# Altium PCB LC4_REV3.PcbDoc (part 1 of 2)
Units mm, origin at the board's own origin, x right, y up, seen from the top; angles counter-clockwise.
Board outline 41.25 x 70 mm, 4 copper layers (Layer 1, Layer 2, Layer 3, Layer 4), stack 1.942 mm thick; 162 components, 362 nets, 610 pads, 239 vias.
Unrouted connection lines stored in the file: 28.
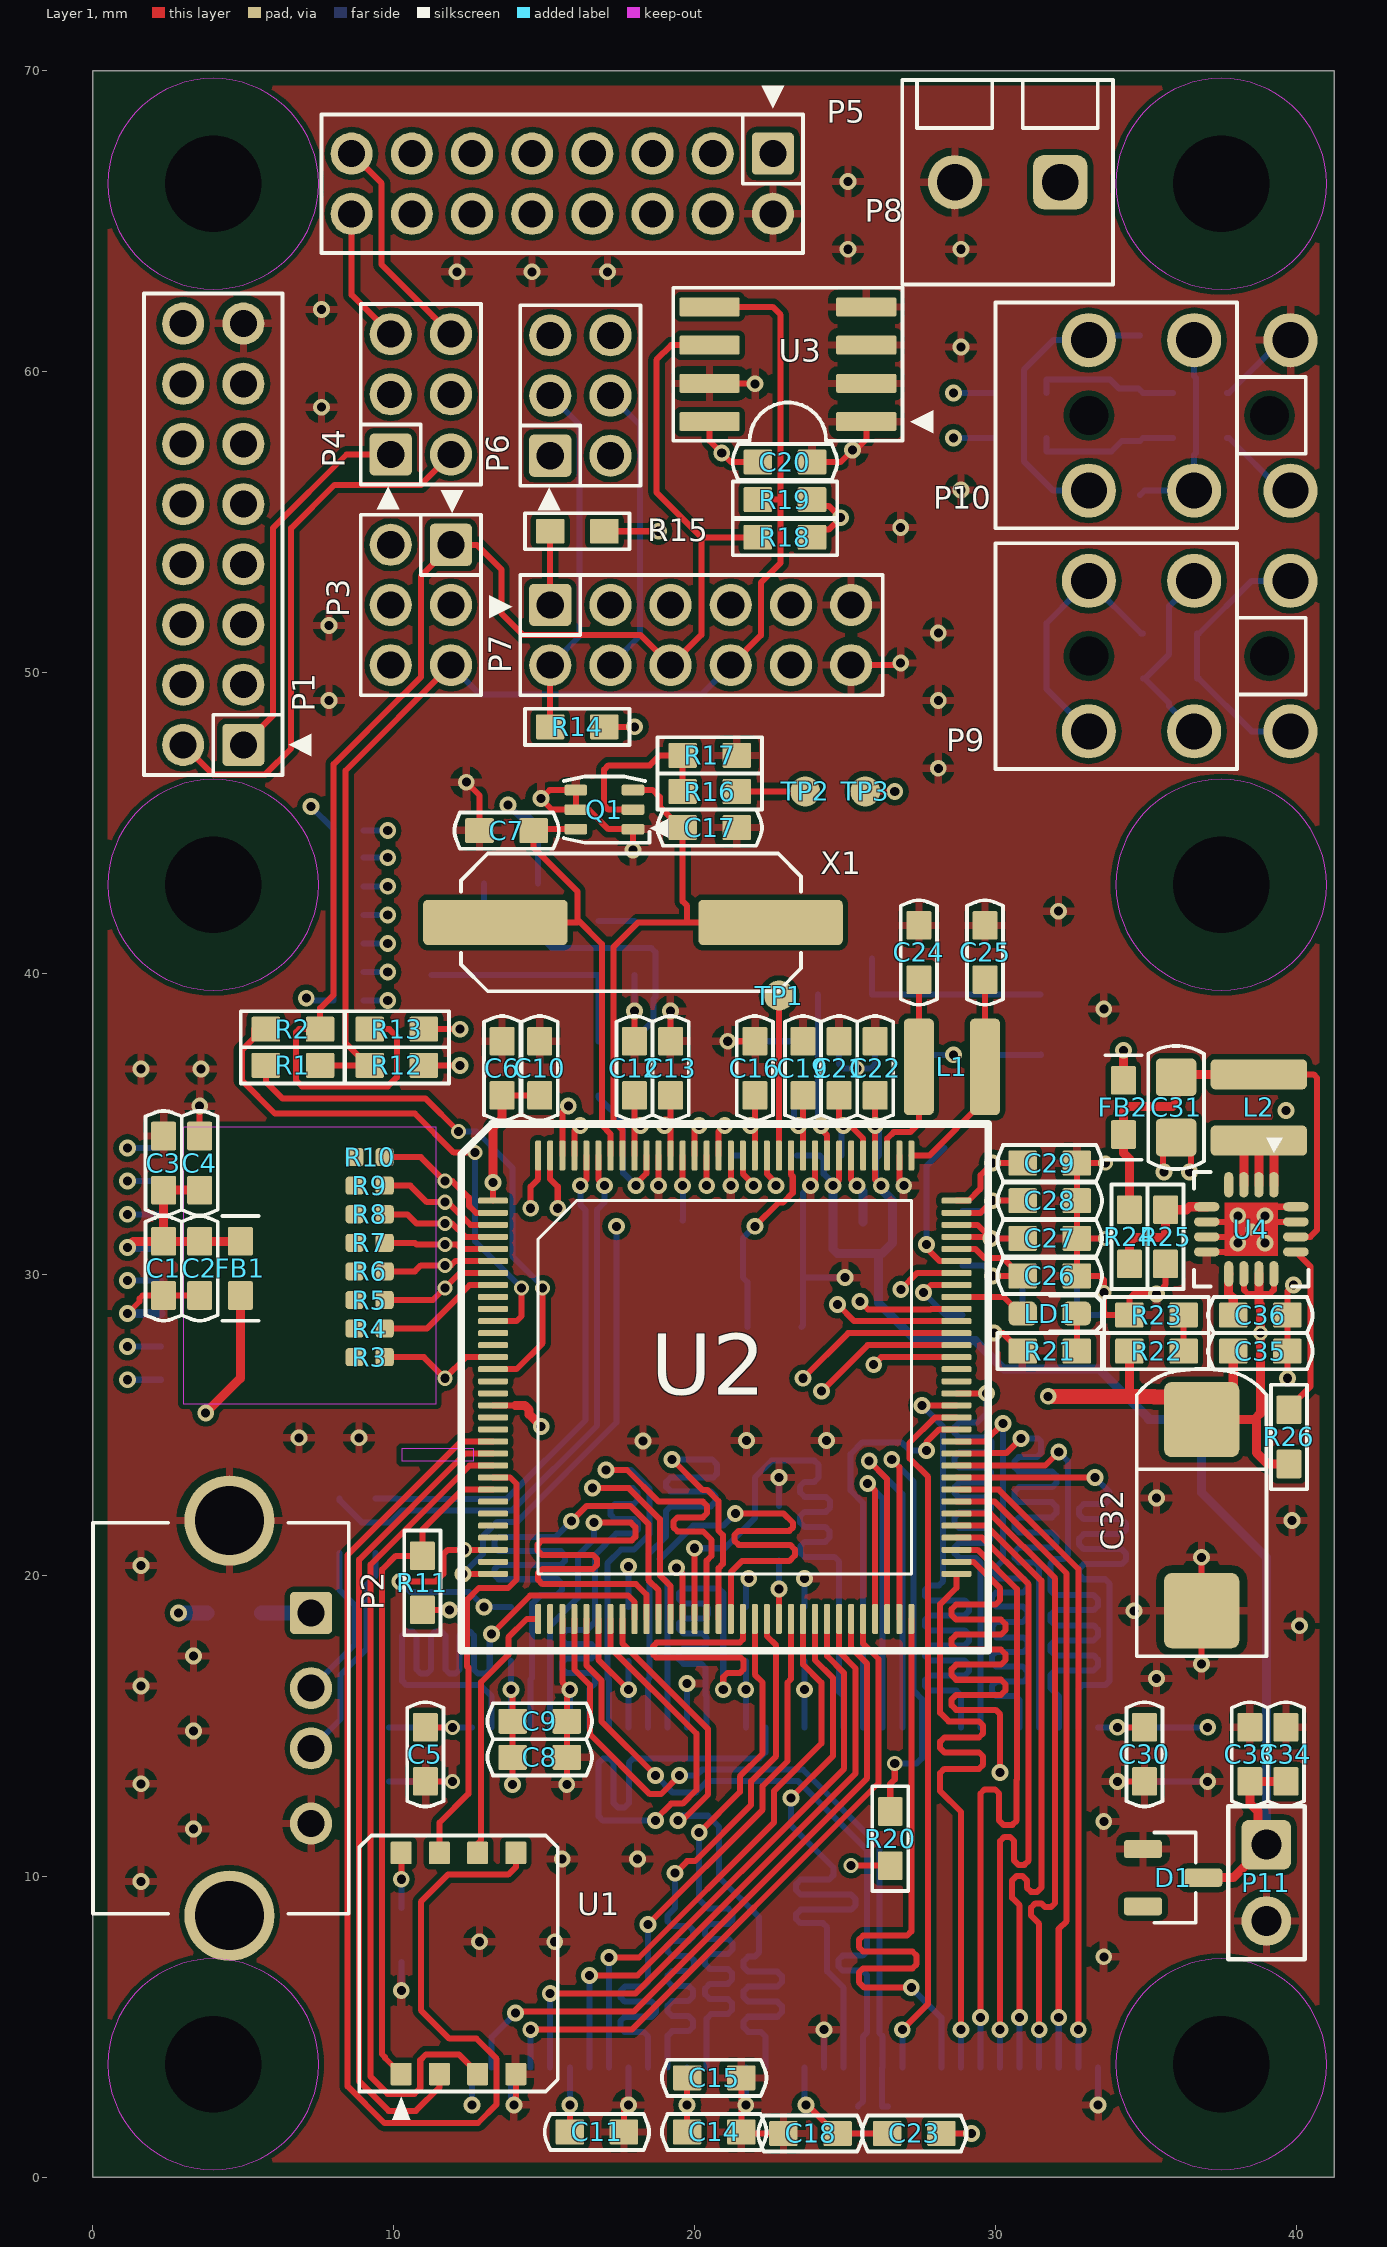
[diagram p0: Layer 1 view]
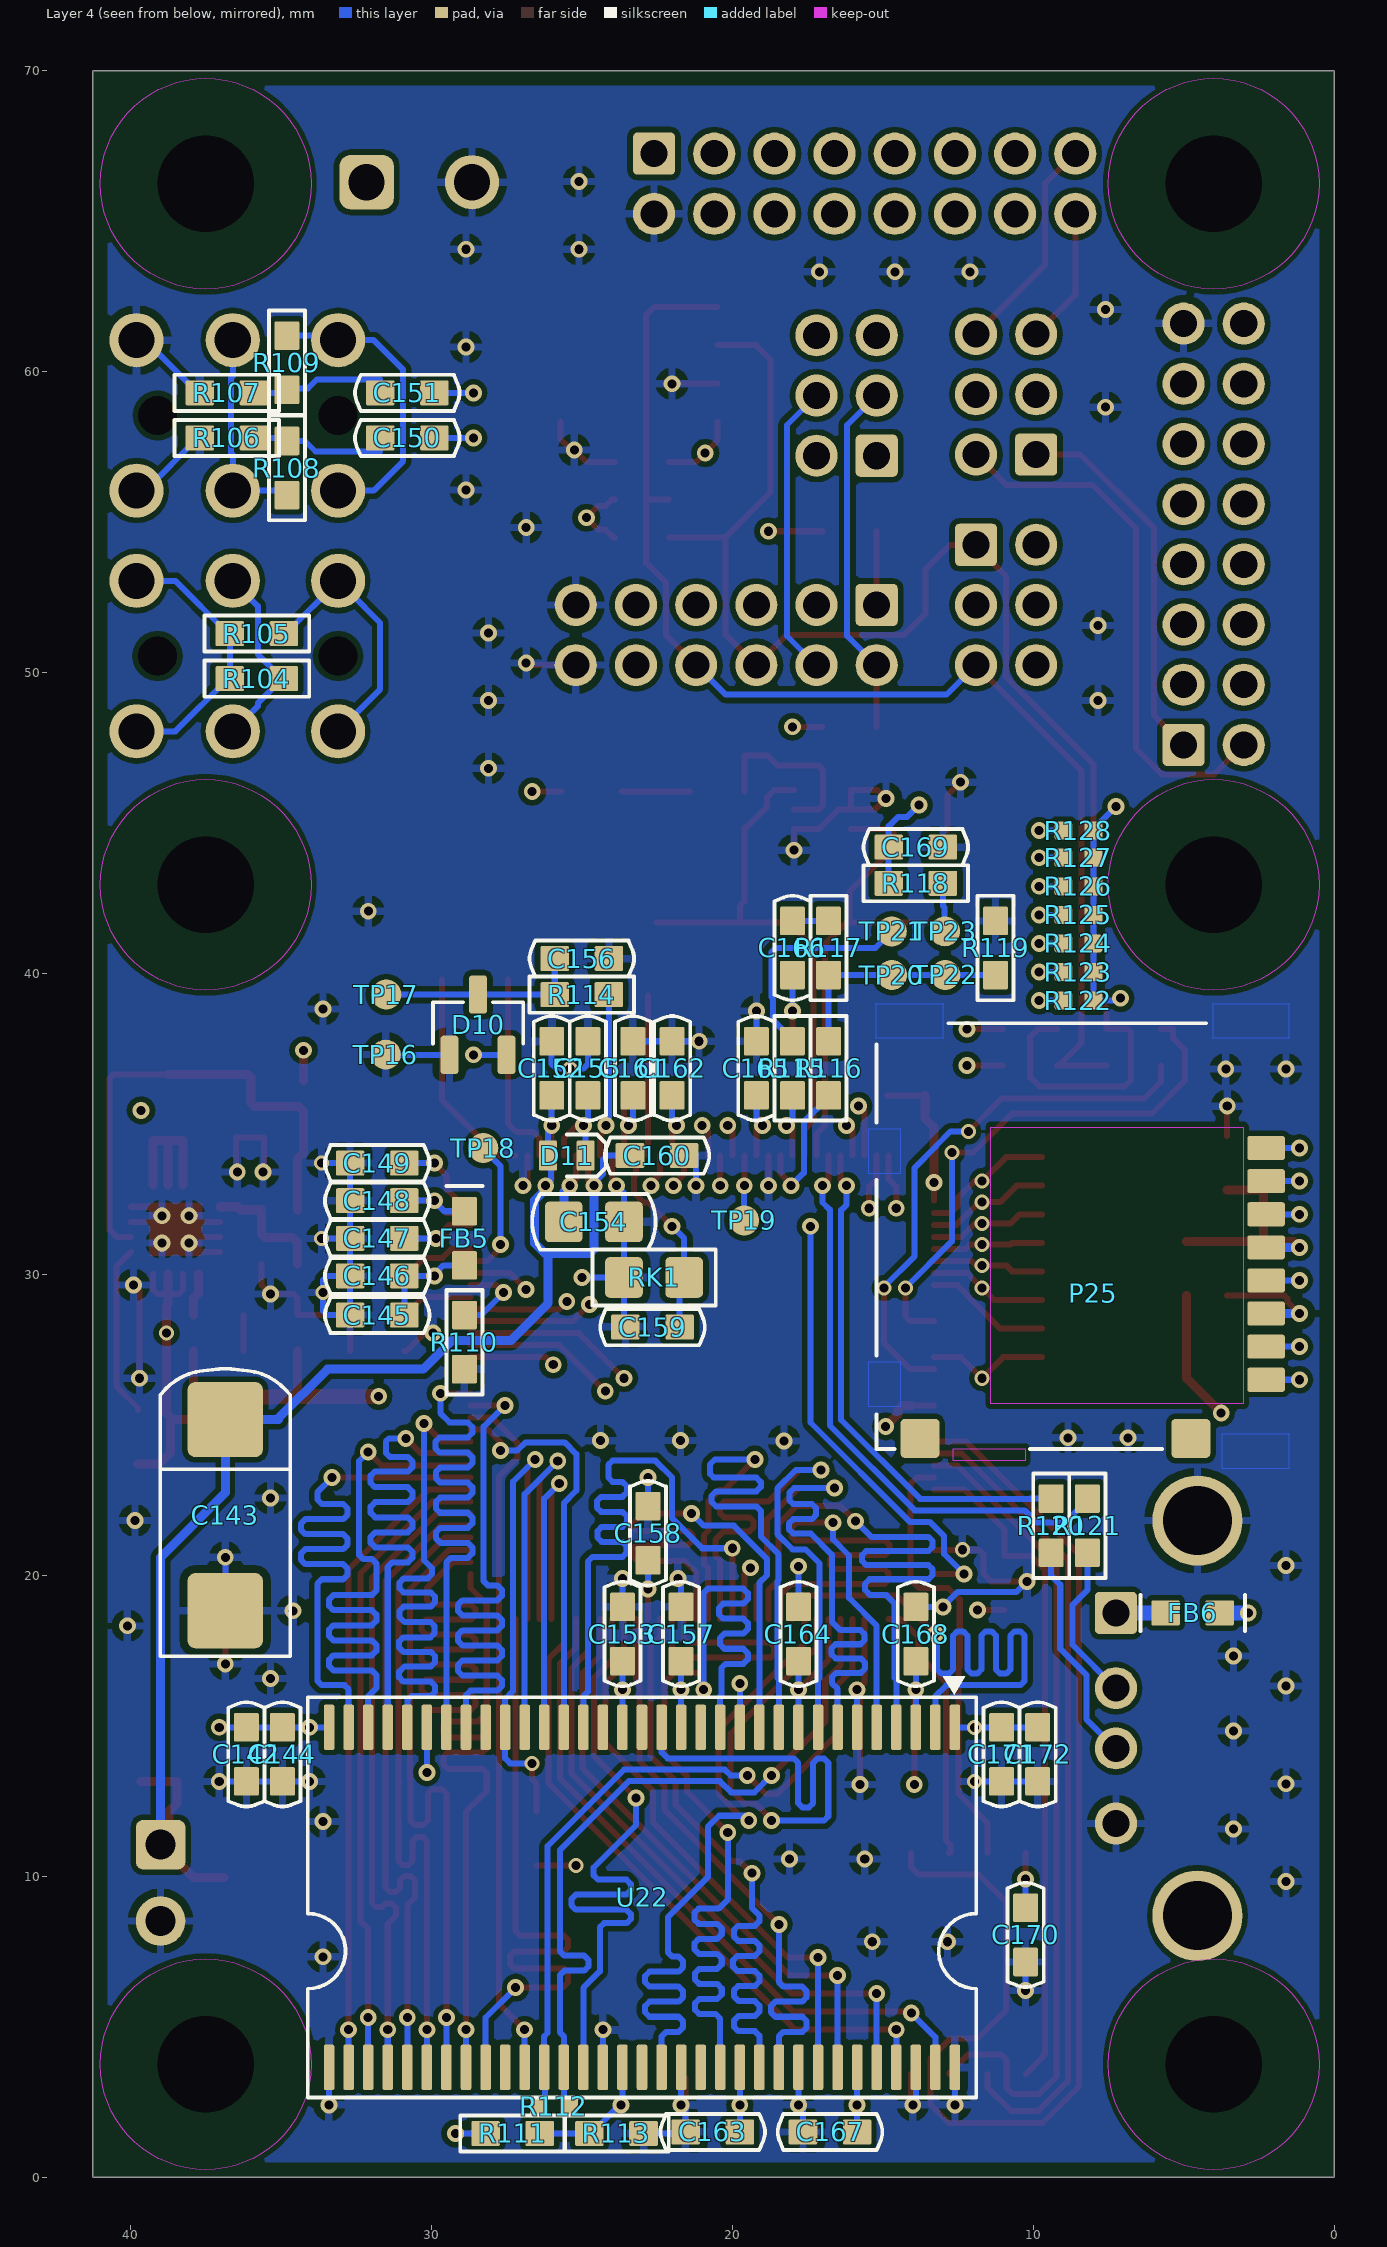
[diagram p1: Layer 4 view, seen from below]
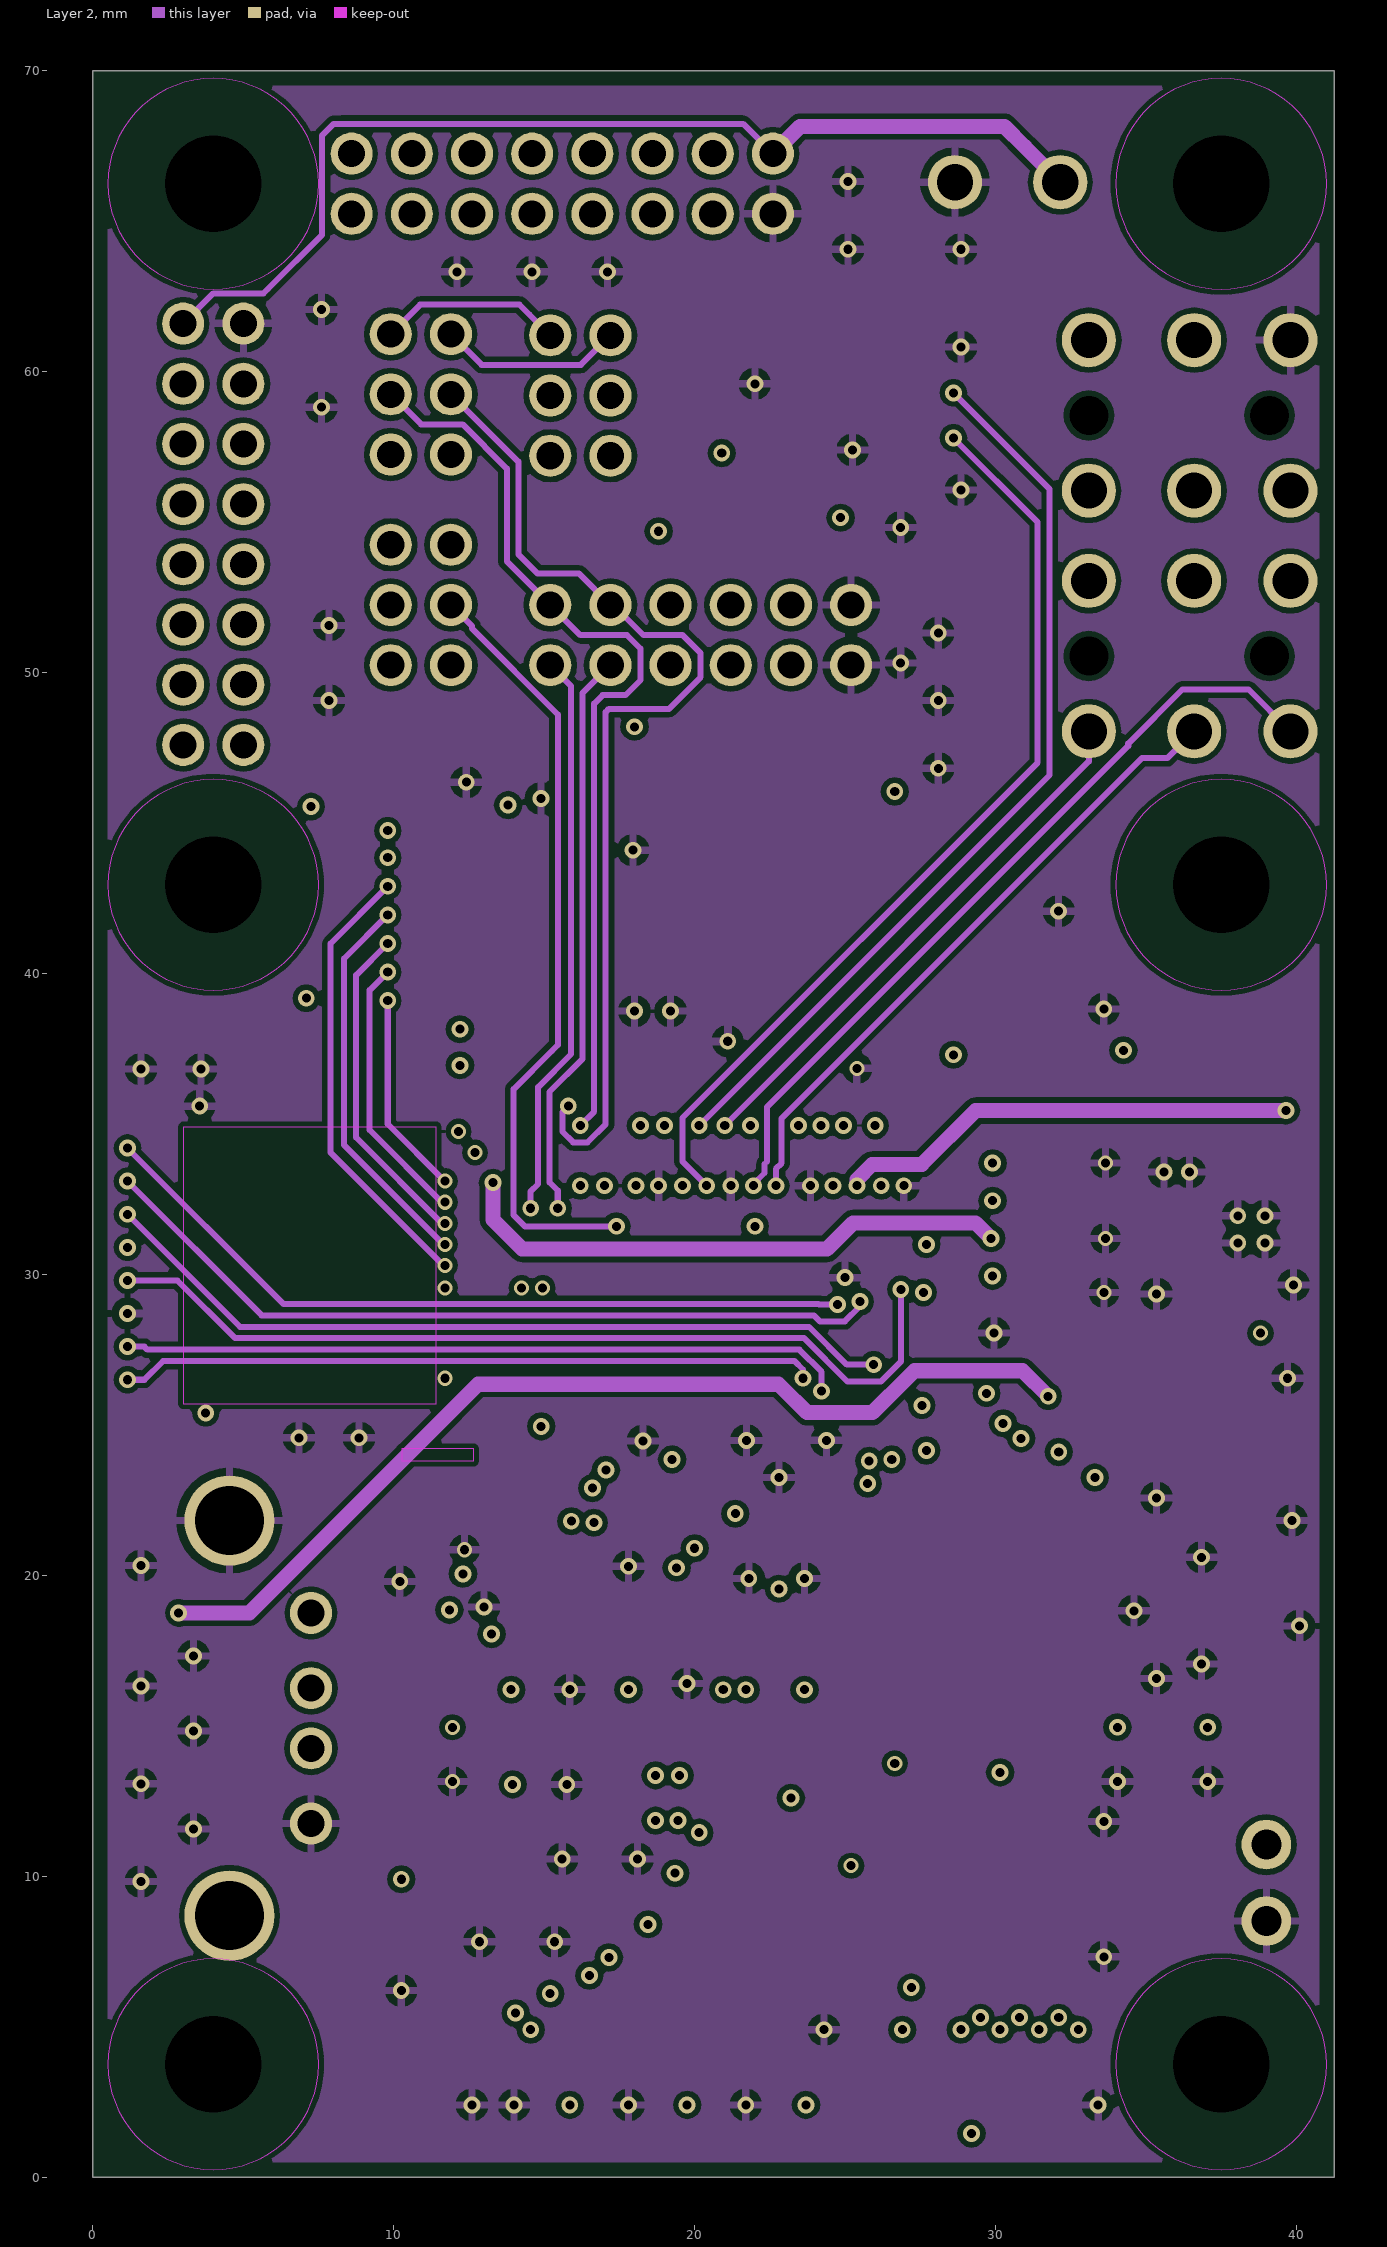
[diagram p2: Layer 2]
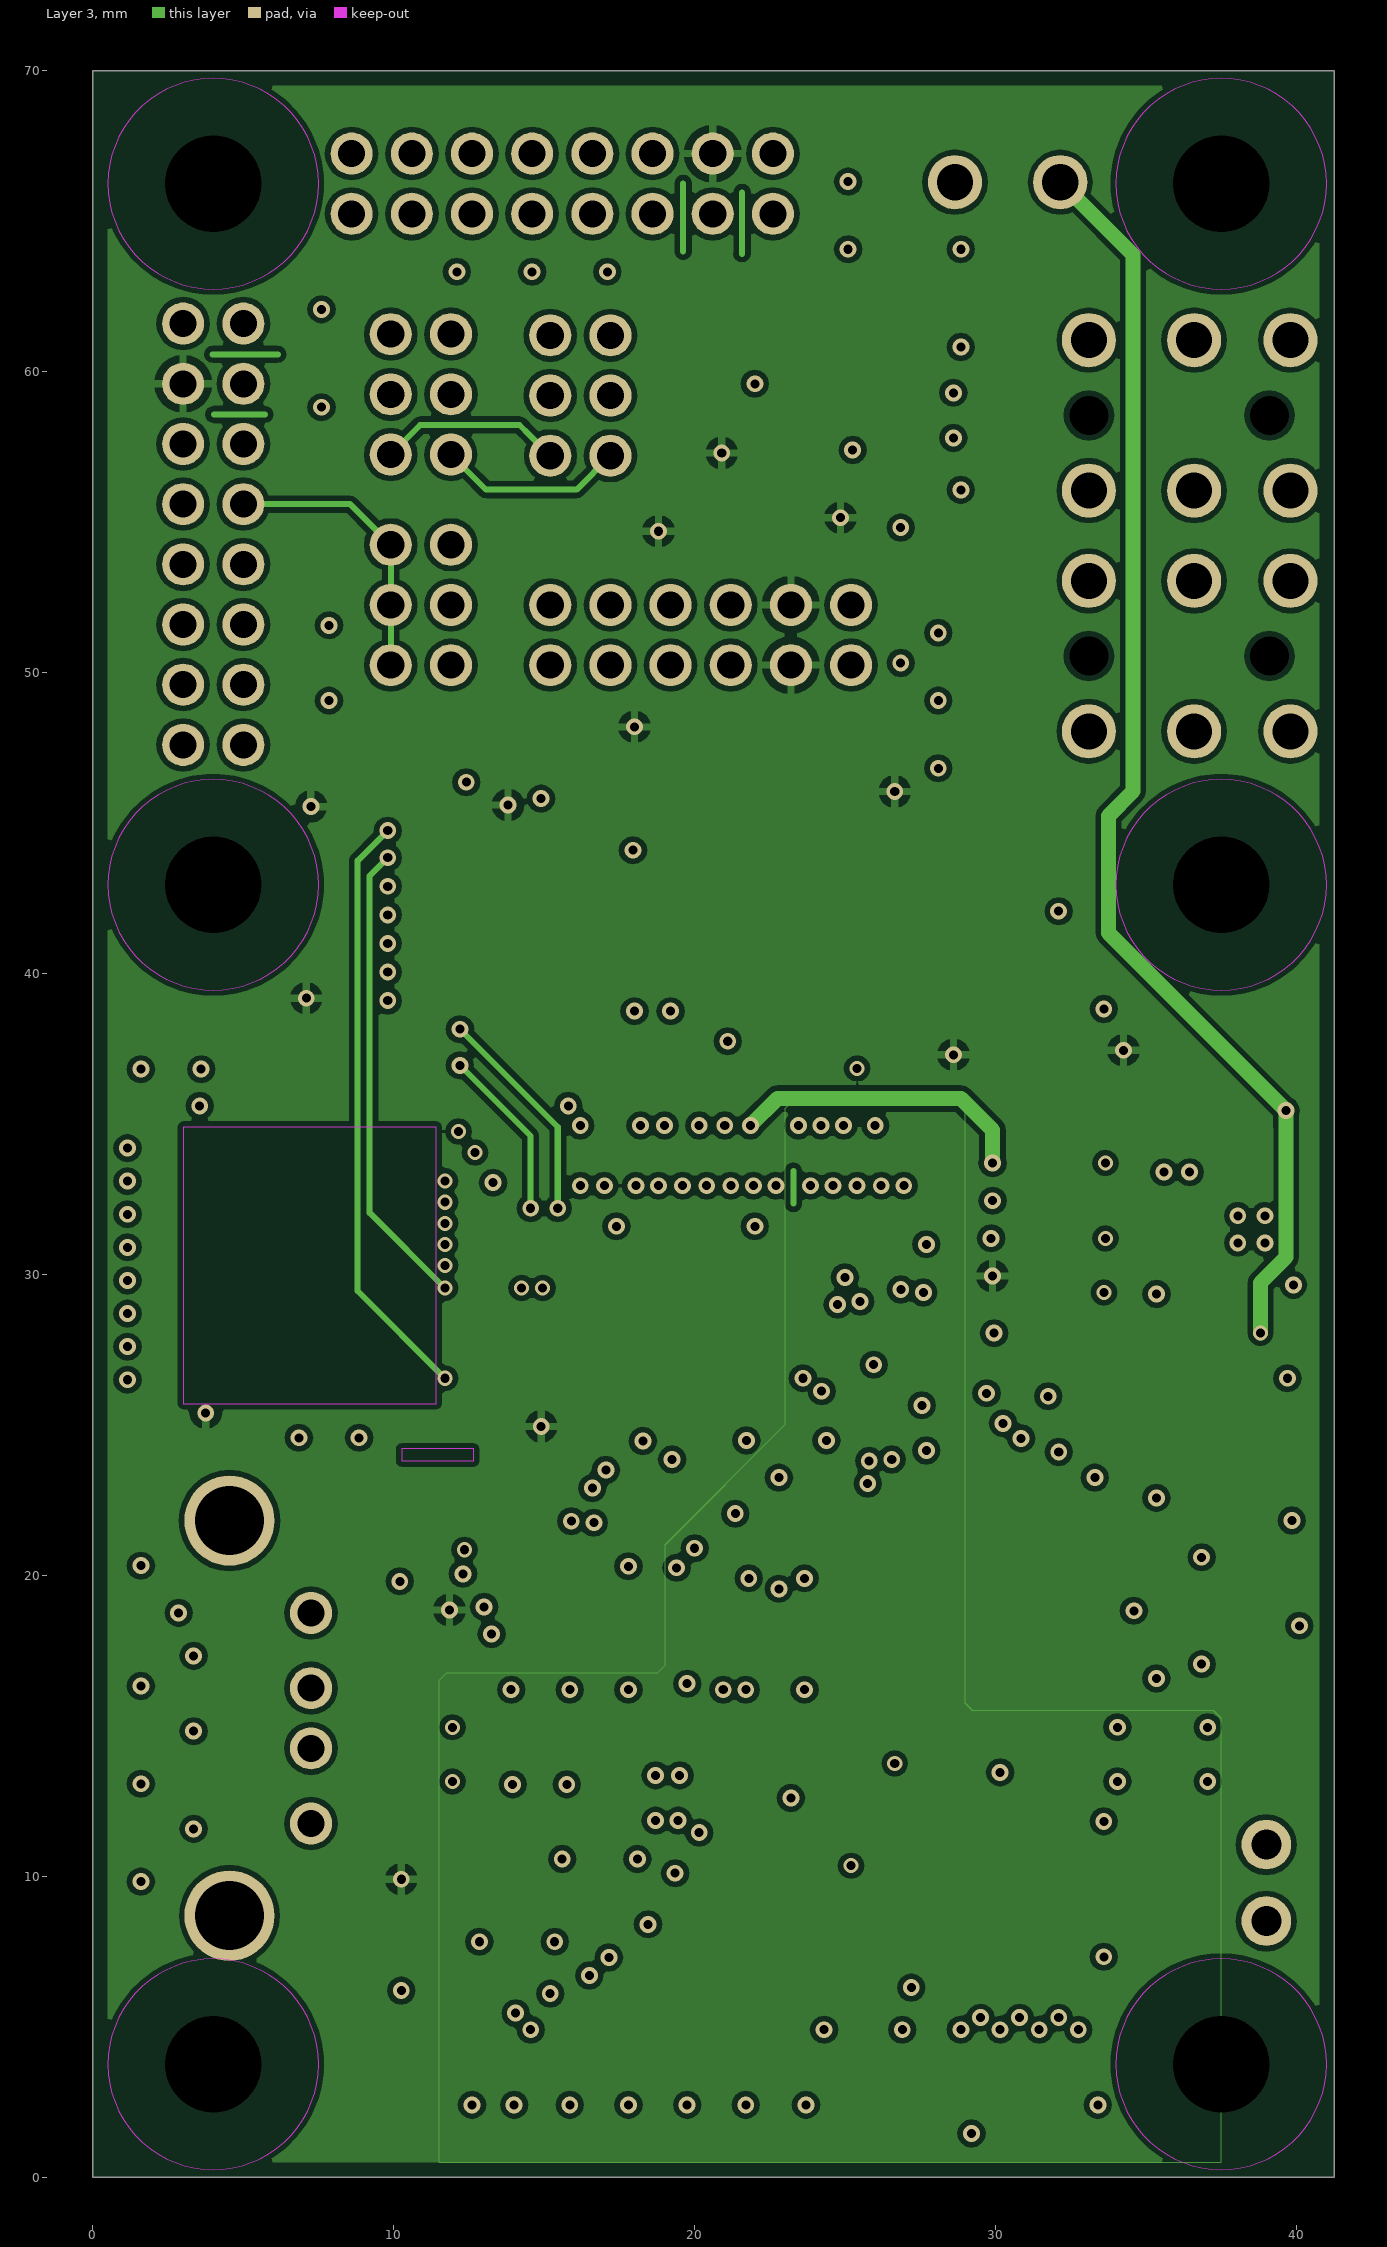
[diagram p3: Layer 3]

## Layer stack, top to bottom
Top Solder: solder mask 0.0762, Solder_Mask, Dk 1
Layer 1: signal copper 0.018
Dielectric 1: core 1.53, Core/Pre-preg, Dk 4.7
Layer 2: signal copper 0.0356
Dielectric2: core 0.1524, Core/Pre-preg, Dk 4.4
Layer 3: signal copper 0.0356
Dielectric3: core 0.1524, Core/Pre-preg, Dk 4.4
Layer 4: signal copper 0.0178
Bottom Solder: solder mask 0.0762, Solder_Mask, Dk 1

## Board outline
0,0 0,70 41.25,70 41.25,0

## Design rules (kind name [scope] priority, off if disabled: settings)
Clearance [All] p1: gap=0.18 except(0.1: Arc-Arc Arc-Track Arc-SMDPad Arc-THPad Arc-Via Arc-Text Track-Text SMDPad-Text THPad-Text Via-Text Fill-Text Poly-Text Region-Text Text-Text)
PolygonConnect [All] p1: connectstyle=Relief reliefconductorwidth=0.254 reliefentries=4 polygonreliefangle="90 Angle" airgapwidth=0.254
RoutingVias [All] p1: holewidth=0.711 width=1.27 viastyle="Through Hole" minholewidth=0.711 minwidth=1.27 maxholewidth=0.711 maxwidth=1.27
SolderMaskExpansion [All] p1: expansion=0.102
Width [All] p1: maxlimit=0.5 minlimit=0.1 preferedwidth=0.254 minimp=50.000000 maximp=50.000000 favimp=50.000000
30 further rules are at their usual default settings.

## Classes and differential pairs
net class (Default): 3V3 3V3_FUSED 8V ADM2CPLD ADM2GPS BRIGHT BUF_RXD BUF_TXD CONF1 CONF2 CONF3 CPLD2ADM CPLD2GPS D1 D2 D3 D4 D5 D6 D7 D8 D[0] D[1] D[2] D[3] D[4] D[5] D[6] D[7] DAC[0] DAC[1] DAC[2] DAC[3] DAC[4] DAC[5] DAC[6] DAC[7] DAC[8] DAC[9] DL1 DL2 DL3 DL4 DL5 DL6 DL7 DL8 DL9 DL10 DL11 DL12 DONE GND GPS2ADM GPS2CPLD GPS_MR GPS_RESET LATCH0 LATCH1 LATCH2 LATCH3 LATCH4 LATCH5 LATCH6 LATCH7 LATCH8 LATCH9 LATCH10 LATCH11 LATCH[0] LATCH[1] LATCH[2] LATCH[3] LATCH[4] LATCH[5] LATCH[6] LATCH[7] LATCH[8] LATCH[9] LATCH[10] LATCH[11] LC_JTAGNB LC_SYNC1 LC_SYNC2 LC_TRIG1 LC_TRIG2 LED[0] LED[1] LED[2] LED[3] LED[4] LED[5] LED[6] LED[7] LED[8] LED[9] LED[10] LED[11] LT_GPLLT LT_INIT NC1 NC2 NC3 NC4 OE OE_ PG PROGRAMN PWR_GOOD SCOM SIN1 SIN1D SIN2 SIN2D SOUT1 SOUT1D SOUT2 SOUT2D SPI_CS SPI_MISO SPI_MOSI SPI_SCK SQW_OUT SRX SS_ENA STX SVCC SW_OUT SX1 SX2 SX3 SX4 SYNC_1PPS SYNC_OUT1S TCK TDI TDO TMS Vin XSIG010002 XSIG010005 XSIG010007 XSIG010008 XSIG010009 XSIG010011 XSIG010019 XSIG010021 XSIG010023 XSIG010025 XSIG010027 XSIG010031 XSIG010032 XSIG010035 XSIG010036 XSIG010038 XSIG010039 XSIG010041 XSIG010042 XSIG010042_36 XSIG010043 XSIG010044 XSIG010051 XSIG010052 XSIG010053 XSIG010054 XSIG010054_36 XSIG010055 XSIG010058 XSIG010065 XSIG010066 XSIG010322 XSIG010325 XSIG010330 XSIG010331 XSIG010332 XSIG010333 XSIG010817 XSIG010818 XSIG010883 XSIG010886 XSIG010891 XSIG010892 XSIG010893 XSIG010894
net class 24V: 5VI GNDI

## Components (designator, comment, footprint, x,y, rotation, side; value= is the part's Value field where it differs from the comment)
C1 "0.0000001" C0603R 2.35,30.2 r270 top
C2 "0.00001" C0603R 3.55,30.2 r270 top
C3 "0.0000001" C0603R 2.35,33.7 r90 top
C4 "0.00001" C0603R 3.55,33.7 r90 top
C5 "0.0000001" C0603R 11.05,14.05 r270 top
C6 "0.0000001" C0603R 13.6,36.85 r90 top
C7 "0.00000000001" C0603R 13.75,44.75 r180 top
C8 "0.00001" C0603R 14.85,13.95 r0 top
C9 "0.0000001" C0603R 14.85,15.15 r0 top
C10 "0.00001" C0603R 14.85,36.85 r90 top
C11 "0.0000001" C0603R 16.75,1.5 r0 top
C12 "0.0000001" C0603R 18,36.85 r90 top
C13 "0.000001" C0603R 19.2,36.85 r90 top
C14 "0.0000001" C0603R 20.65,1.5 r0 top
C15 "0.0000001" C0603R 20.65,3.3 r0 top
C16 "0.0000001" C0603R 22,36.85 r90 top
C17 "0.00000000001" C0603R 20.5,44.85 r0 top
C18 "0.0000001" C0603R 23.85,1.45 r180 top
C19 "0.0000001" C0603R 23.6,36.85 r90 top
C20 "0.0000001" C0603R 23,57 r0 top
C21 "0.0000001" C0603R 24.8,36.85 r90 top
C22 "0.0000001" C0603R 26,36.85 r90 top
C23 "0.0000001" C0603R 27.3,1.45 r180 top
C24 "Comment" C0603R 27.45,40.7 r90 top
C25 "Comment" C0603R 29.65,40.7 r90 top
C26 "0.0000001" C0603R 31.8,29.95 r0 top
C27 "0.0000001" C0603R 31.8,31.2 r0 top
C28 "0.0000001" C0603R 31.8,32.45 r0 top
C29 "0.0000001" C0603R 31.8,33.7 r0 top
C30 "0.0000001" C0603R 34.95,14.05 r270 top
C31 "0.00001" C0805R 36,35.55 r270 top
C32 "0.00022" C_D_SMD_R 36.85,22 r270 top
C33 "0.0000001" C0603R 38.45,14.05 r90 top
C34 "0.00001" C0603R 39.65,14.05 r90 top
C35 "0.0000022" C0603R 38.8,27.45 r0 top
C36 "0.00000001" C0603R 38.8,28.65 r0 top
C142 "0.0000001" C0603R 36.15,14.05 r270 bottom
C143 "0.00022" C_D_SMD_R 36.85,22 r270 bottom
C144 "0.0000001" C0603R 34.95,14.05 r270 bottom
C145 "0.00001" C0603R 31.8,28.65 r0 bottom
C146 "0.00001" C0603R 31.8,29.95 r0 bottom
C147 "0.00001" C0603R 31.8,31.2 r0 bottom
C148 "0.00001" C0603R 31.8,32.45 r0 bottom
C149 "0.00001" C0603R 31.8,33.7 r0 bottom
C150 "0.000001" C0603R 30.8,57.8 r0 bottom
C151 "0.000001" C0603R 30.8,59.3 r0 bottom
C152 "0.00001" C0603R 26,36.85 r90 bottom
C153 "0.0000001" C0603R 23.65,18.05 r90 bottom
C154 "0.00001" C0805R 24.6,31.75 r180 bottom
C155 "0.00001" C0603R 24.8,36.85 r90 bottom
C156 "0.000000000047" C0603R 25,40.5 r180 bottom
C157 "0.0000001" C0603R 21.7,18.05 r90 bottom
C158 "0.0000001" C0603R 22.8,21.4 r90 bottom
C159 "0.00000001" C0603R 22.65,28.25 r0 bottom
C160 "0.00001" C0603R 22.5,33.95 r180 bottom
C161 "0.00001" C0603R 23.3,36.85 r90 bottom
C162 "0.00001" C0603R 22,36.85 r90 bottom
C163 "0.0000001" C0603R 20.65,1.5 r0 bottom
C164 "0.0000001" C0603R 17.8,18.05 r90 bottom
C165 "0.000001" C0603R 19.2,36.85 r90 bottom
C166 "0.0000001" C0603R 18,40.85 r270 bottom
C167 "0.0000001" C0603R 16.75,1.5 r0 bottom
C168 "0.0000001" C0603R 13.9,18.05 r90 bottom
C169 "0.0000001" C0603R 13.9,44.2 r180 bottom
C170 "0.0000001" C0603R 10.25,8.05 r270 bottom
C171 "0.0000001" C0603R 11.05,14.05 r270 bottom
C172 "0.0000001" C0603R 9.85,14.05 r270 bottom
D1 "Comment" SOT23_new_mech 35.9,9.95 r270 top
D10 "Comment" SOT23_new_mech 28.45,38.3 r180 bottom
D11 "Comment" CD0603 25.5,33.95 r0 bottom
FB1 "Comment" L0603 4.9,30.2 r270 top
FB2 "Comment" L0603 34.25,35.55 r90 top
FB5 "Comment" L0603 28.9,31.2 r270 bottom
FB6 "Comment" L0603 4.7,18.75 r180 bottom
L1 "0.00001" IND_744025100 28.55,36.9 r270 top
L2 "0.0000022" IND_744025002 38.75,35.55 r0 top
LD1 "Comment" D0603 31.8,28.7 r180 top
P1 "Comment" CN_PLD_2x8_2mm 5,47.6 r90 top
P2 "Comment" CN_USBA-1J 7.25,18.75 r270 top
P3 "Comment" CN_PBD_2x3_2mm 11.9,54.25 r270 top
P4 "Comment" CN_PBD_2x3_2mm 9.9,57.25 r90 top
P5 "Comment" CN_PLD_2x8_2mm 22.6,67.25 r180 top
P6 "Comment" CN_PBD_2x3_2mm 15.2,57.21 r90 top
P7 "Comment" CN_PBD_2x6_2mm 15.2,52.25 r0 top
P8 "Comment" CN_HDR_1x2_3m50_S350 32.15,66.3 r180 top
P9 "Comment" CN_AUDIO_ST033 39.8,50.55 r180 top
P10 "Comment" CN_AUDIO_ST033 39.8,58.55 r180 top
P11 "Comment" CN_HDR_1x2 39,11.05 r270 top
P25 "Comment" CN_MSD_503182-003 2.26,30.35 r90 bottom
Q1 "Comment" SOT363 17,45.45 r90 top
R1 "Comment" R0603 6.65,36.95 r180 top
R2 "Comment" R0603 6.65,38.15 r180 top
R3 "Comment" R0402R 9.2,27.25 r180 top
R4 "Comment" R0402R 9.2,28.2 r180 top
R5 "Comment" R0402R 9.2,29.15 r180 top
R6 "Comment" R0402R 9.2,30.1 r180 top
R7 "Comment" R0402R 9.2,31.05 r180 top
R8 "Comment" R0402R 9.2,32 r180 top
R9 "Comment" R0402R 9.2,32.95 r180 top
R10 "Comment" R0402R 9.2,33.9 r180 top
R11 "10000" R0603 10.95,19.75 r270 top
R12 "Comment" R0603 10.1,36.95 r0 top
R13 "Comment" R0603 10.1,38.15 r0 top
R14 "10000" R0603 16.1,48.2 r0 top
R15 "10000" R0603 16.1,54.7 r0 top
R16 "10000" R0603 20.5,46.05 r0 top
R17 "10000" R0603 20.5,47.25 r0 top
R18 "10000" R0603 23,54.5 r0 top
R19 "10000" R0603 23,55.75 r0 top
R20 "10000" R0603 26.5,11.25 r90 top
R21 "1000" R0603 31.8,27.45 r0 top
R22 "Comment" R0603 35.35,27.45 r180 top
R23 "Comment" R0603 35.35,28.65 r0 top
R24 "360000" R0603 34.45,31.25 r270 top
R25 "100000" R0603 35.65,31.25 r270 top
R26 "1000" R0603 39.75,24.6 r270 top
R104 "100" R0603 35.8,49.8 r180 bottom
R105 "100" R0603 35.8,51.3 r180 bottom
R106 "4700" R0603 36.8,57.8 r180 bottom
R107 "4700" R0603 36.8,59.3 r180 bottom
R108 "10000" R0603 34.8,56.8 r270 bottom
R109 "10000" R0603 34.8,60.3 r90 bottom
R110 "10000" R0603 28.9,27.75 r90 bottom
R111 "1000" R0603 27.3,1.45 r180 bottom
R112 "Comment" R0402R 25.925,2.35 r0 bottom
R113 "1000" R0603 23.85,1.45 r180 bottom
R114 "0" R0603 25,39.3 r0 bottom
R115 "0" R0603 18,36.85 r90 bottom
R116 "1000" R0603 16.8,36.85 r270 bottom
R117 "1000" R0603 16.8,40.85 r90 bottom
R118 "10000" R0603 13.9,43 r180 bottom
R119 "100000" R0603 11.25,40.85 r90 bottom
R120 "0" R0603 9.4,21.65 r270 bottom
R121 "0" R0603 8.2,21.65 r270 bottom
R122 "Comment" R0402R 8.5,39.1 r180 bottom
R123 "Comment" R0402R 8.5,40.05 r180 bottom
R124 "Comment" R0402R 8.5,41 r180 bottom
R125 "Comment" R0402R 8.5,41.95 r180 bottom
R126 "Comment" R0402R 8.5,42.9 r180 bottom
R127 "Comment" R0402R 8.5,43.85 r180 bottom
R128 "Comment" R0402R 8.5,44.75 r180 bottom
RK1 "Comment" R0805 22.6,29.9 r0 bottom
TP1 "Comment" TP_1mm 22.806,39.265 r0 top
TP2 "Comment" TP_1mm 23.673,46.054 r0 top
TP3 "Comment" TP_1mm 25.669,46.056 r0 top
TP16 "Comment" TP_1mm 31.516,37.304 r0 bottom
TP17 "Comment" TP_1mm 31.499,39.301 r0 bottom
TP18 "Comment" TP_1mm 28.277,34.202 r0 bottom
TP19 "Comment" TP_1mm 19.604,31.795 r0 bottom
TP20 "Comment" TP_1mm 14.694,39.951 r0 bottom
TP21 "Comment" TP_1mm 14.698,41.4 r0 bottom
TP22 "Comment" TP_1mm 12.922,39.957 r0 bottom
TP23 "Comment" TP_1mm 12.935,41.404 r0 bottom
U1 "Comment" CASON8 12.15,7.1 r0 top
U2 "Comment" LQFP-128 21,26.25 r270 top locked
U3 "Comment" SO8 23.1,60.25 r90 top
U4 "Comment" QFN_N16_EPAD_VIA 38.5,31.5 r270 top
U22 "Comment" TSOP66 23,9.3 r0 bottom locked
X1 "Comment" XTAL_HC49SM 17.95,41.7 r0 top
? "Comment" "LAMINATE SEQUENCE_4Both_FAB" 27,-83.75 r0 top
? "Comment" sot23_mech 35.9,9.95 r270 top
? "Comment" sot23_mech 28.45,38.3 r180 bottom

## Footprints (in the part's own frame and the unit in brackets; to place one, negate y for a bottom-side part, rotate by r counter-clockwise, add the part's x,y. Pads: shape width x height; smd on the part's side, far side on the other; paste and mask are expansions set on the pad)
C0603R [mm]
  rrect12% 0.95x0.83 smd paste-0.025 mask+0.05: 1(-0.9,0) 2(0.9,0)
  silkscreen extent -1.74,-0.6 1.74,0.6, body extent -0.8,-0.4 0.8,0.4, height 1
C0805R [mm]
  rrect24% 1.25x1.35 smd paste-0.025 mask+0.075: 1(-1,0) 2(1,0)
  silkscreen extent -2.05,-0.93 2.05,0.93, body extent -1,-0.63 1,0.63, height 1.3
C_D_SMD_R [mm]
  rrect20% 2.5x2.5 smd paste-0.025 mask+0.075: 1(-3.175,0) 2(3.175,0)
  silkscreen extent -4.86,-2.16 4.69,2.16, body extent -3.65,-2.15 3.65,2.15, height 2.8
CASON8 [mm]
  rrect14% 0.7x0.75 smd paste-0.025 mask+0.05: 1(-1.905,-3.675) 2(-0.635,-3.675) 3(0.635,-3.675) 4(1.905,-3.675) 5(1.905,3.675) 6(0.635,3.675) 7(-0.635,3.675) 8(-1.905,3.675)
  silkscreen extent -3.3,-5.2 3.3,4.25, body extent -3,-4 3,4, height 1
CD0603 [mm]
  rrect17% 0.6x1 smd paste-0.025 mask-127: 1(-0.625,0) 2(0.625,0)
  silkscreen extent -1.3,-0.7 0,0.7, body extent -0.87,-0.5 0.87,0.5, height 0.85
CN_AUDIO_ST033 [mm]
  round 1.8 hole 1.2 paste-127 mask+0.05: 1(0,-2.5) 2(3.2,-2.5) 5(6.7,-2.5)
  round 1.8 hole 1.2 paste-127 mask+0.075: ""(0,2.5) ""(3.2,2.5) ""(6.7,2.5)
  round 0 hole 1.3 unplated paste-127 mask+0.75: ""(0.7,0) ""(6.7,0)
  silkscreen extent -0.51,-3.75 9.8,3.75, body extent -0.9,-3.4 7.6,-1.6, height 0.25
CN_HDR_1x2 [mm]
  rrect30% 1.65x1.65 / inner round 1.65 / far side rrect30% 1.65x1.65 hole 1 paste-127 mask+0.05: 1(0,0)
  round 1.65 hole 1 paste-127 mask+0.05: 2(2.54,0)
  silkscreen extent -1.27,-1.27 3.81,1.27, body extent -1.27,-1.27 3.81,1.27, height 5.08
CN_HDR_1x2_3m50_S350 [mm]
  rrect39% 1.8x1.8 / inner round 1.8 / far side rrect39% 1.8x1.8 hole 1.2 paste-127 mask+0.05: 1(0,0)
  round 1.8 hole 1.2 paste-127 mask+0.05: 2(3.5,0)
  silkscreen extent -1.75,-3.4 5.25,3.4, body extent -1.75,-3.4 5.25,3.4, height 8.5
CN_MSD_503182-003 [mm]
  rrect19% 0.8x1.25 smd paste-0.025 mask+0.05: 1(3.85,0) 2(2.75,0) 3(1.65,0) 4(0.55,0) 5(-0.55,0) 6(-1.65,0) 7(-2.75,0) 8(-3.85,0)
  rrect23% 1.3x1.3 smd paste-0.025 mask+0.075: A(-5.8,2.5) B(-5.8,11.5)
  Layer 1 pour cut-out: -6.55,8 -6.55,10.4 -6.15,10.4 -6.15,8
  Layer 1 pour cut-out: -4.65,0.75 -4.65,9.15 4.55,9.15 4.55,0.75
  Keep-Out Layer region: -4.65,0.75 -4.65,9.15 4.55,9.15 4.55,0.75
  Keep-Out Layer region: -6.55,8 -6.55,10.4 -6.15,10.4 -6.15,8
  silkscreen extent -6.15,2 8,12.95, body extent -6.15,-2 8,12.95, height 1.45
CN_PBD_2x3_2mm [mm]
  rrect21% 1.4x1.4 / inner round 1.4 / far side rrect21% 1.4x1.4 hole 0.9 paste-127 mask+0.05: 1(0,0)
  round 1.4 hole 0.9 paste-127 mask+0.05: 2(0,-2) 3(2,0) 4(2,-2) 5(4,0) 6(4,-2)
  silkscreen extent -1.82,-3 5,1, body extent -1,-3 5,1, height 4.5
CN_PBD_2x6_2mm [mm]
  rrect21% 1.4x1.4 / inner round 1.4 / far side rrect21% 1.4x1.4 hole 0.9 paste-127 mask+0.05: 1(0,0)
  round 1.4 hole 0.9 paste-127 mask+0.05: 2(0,-2) 3(2,0) 4(2,-2) 5(4,0) 6(4,-2) 7(6,0) 8(6,-2) 9(8,0) 10(8,-2) 11(10,0) 12(10,-2)
  silkscreen extent -2.02,-3 11.05,1, body extent -1,-3 11.05,1, height 4.5
CN_PLD_2x8_2mm [mm]
  rrect21% 1.4x1.4 / inner round 1.4 / far side rrect21% 1.4x1.4 hole 0.9 paste-127 mask+0.05: 1(0,0)
  round 1.4 hole 0.9 paste-127 mask+0.05: 2(0,2) 3(2,0) 4(2,2) 5(4,0) 6(4,2) 7(6,0) 8(6,2) 9(8,0) 10(8,2) 11(10,0) 12(10,2) 13(12,0) 14(12,2) 15(14,0) 16(14,2)
  silkscreen extent -1,-2.25 15,3.3, body extent -1,-1.3 15,3.3, height 4.5
CN_USBA-1J [mm]
  rrect21% 1.4x1.4 / inner round 1.4 / far side rrect21% 1.4x1.4 hole 0.9 paste-127 mask+0.05: 1(0,0)
  round 1.4 hole 0.9 paste-127 mask+0.05: 2(2.5,0) 3(4.5,0) 4(7,0)
  round 3 hole 2.3 paste-127 mask+0.1: 5(-3.07,-2.71) ""(10.06,-2.71)
  silkscreen extent -3,-7.25 10,1.25, body extent -4.57,-4.21 7.7,0.7, height 0.25
D0603 [mm]
  rrect50% 0.95x0.8 smd paste-0.025 mask+0.05: 1(-0.9,0) 2(0.9,0)
  silkscreen extent -1.74,-0.6 0,0.6, body extent -0.87,-0.5 0.87,0.5, height 1.02
IND_744025002 [mm]
  rrect30% 3.2x1 smd paste-127 mask+0.075: 1(0,-1.1) 2(0,1.1)
  body extent -1.4,-1.4 1.4,1.4, height 3
IND_744025100 [mm]
  rrect30% 3.2x1 smd paste-127 mask+0.075: 1(0,-1.1) 2(0,1.1)
  body extent -1.4,-1.4 1.4,1.4, height 3
L0603 [mm]
  rrect12% 0.95x0.83 smd paste-0.025 mask+0.05: 1(-0.9,0) 2(0.9,0)
  silkscreen extent -1.74,-0.6 1.74,0.6, body extent -0.8,-0.4 0.8,0.4, height 1
"LAMINATE SEQUENCE_4Both_FAB" [mm]
  body extent -2.85,39.94 17.15,54.35, height 0.25
LQFP-128 [mm]
  rrect50% 0.2x1 smd paste+0 mask-127: 1(-6.2,-7.7) 2(-5.8,-7.7) 3(-5.4,-7.7) 4(-5,-7.7) 5(-4.6,-7.7) 6(-4.2,-7.7) 7(-3.8,-7.7) 8(-3.4,-7.7) 9(-3,-7.7) 10(-2.6,-7.7) 11(-2.2,-7.7) 12(-1.8,-7.7) 13(-1.4,-7.7) 14(-1,-7.7) 15(-0.6,-7.7) 16(-0.2,-7.7) 17(0.2,-7.7) 18(0.6,-7.7) 19(1,-7.7) 20(1.4,-7.7) 21(1.8,-7.7) 22(2.2,-7.7) 23(2.6,-7.7) 24(3,-7.7) 25(3.4,-7.7) 26(3.8,-7.7) 27(4.2,-7.7) 28(4.6,-7.7) 29(5,-7.7) 30(5.4,-7.7) 31(5.8,-7.7) 32(6.2,-7.7) 65(6.2,7.7) 66(5.8,7.7) 67(5.4,7.7) 68(5,7.7) 69(4.6,7.7) 70(4.2,7.7) 71(3.8,7.7) 72(3.4,7.7) 73(3,7.7) 74(2.6,7.7) 75(2.2,7.7) 76(1.8,7.7) 77(1.4,7.7) 78(1,7.7) 79(0.6,7.7) 80(0.2,7.7) 81(-0.2,7.7) 82(-0.6,7.7) 83(-1,7.7) 84(-1.4,7.7) 85(-1.8,7.7) 86(-2.2,7.7) 87(-2.6,7.7) 88(-3,7.7) 89(-3.4,7.7) 90(-3.8,7.7) 91(-4.2,7.7) 92(-4.6,7.7) 93(-5,7.7) 94(-5.4,7.7) 95(-5.8,7.7) 96(-6.2,7.7)
  rrect50% 1x0.2 smd paste+0 mask-127: 33(7.7,-6.2) 34(7.7,-5.8) 35(7.7,-5.4) 36(7.7,-5) 37(7.7,-4.6) 38(7.7,-4.2) 39(7.7,-3.8) 40(7.7,-3.4) 41(7.7,-3) 42(7.7,-2.6) 43(7.7,-2.2) 44(7.7,-1.8) 45(7.7,-1.4) 46(7.7,-1) 47(7.7,-0.6) 48(7.7,-0.2) 49(7.7,0.2) 50(7.7,0.6) 51(7.7,1) 52(7.7,1.4) 53(7.7,1.8) 54(7.7,2.2) 55(7.7,2.6) 56(7.7,3) 57(7.7,3.4) 58(7.7,3.8) 59(7.7,4.2) 60(7.7,4.6) 61(7.7,5) 62(7.7,5.4) 63(7.7,5.8) 64(7.7,6.2) 97(-7.7,6.2) 98(-7.7,5.8) 99(-7.7,5.4) 100(-7.7,5) 101(-7.7,4.6) 102(-7.7,4.2) 103(-7.7,3.8) 104(-7.7,3.4) 105(-7.7,3) 106(-7.7,2.6) 107(-7.7,2.2) 108(-7.7,1.8) 109(-7.7,1.4) 110(-7.7,1) 111(-7.7,0.6) 112(-7.7,0.2) 113(-7.7,-0.2) 114(-7.7,-0.6) 115(-7.7,-1) 116(-7.7,-1.4) 117(-7.7,-1.8) 118(-7.7,-2.2) 119(-7.7,-2.6) 120(-7.7,-3) 121(-7.7,-3.4) 122(-7.7,-3.8) 123(-7.7,-4.2) 124(-7.7,-4.6) 125(-7.7,-5) 126(-7.7,-5.4) 127(-7.7,-5.8) 128(-7.7,-6.2)
  silkscreen extent -8.75,-8.75 8.75,8.75, body extent -8.75,-8.5 8.75,8.75, height 0.25
QFN_N16_EPAD_VIA [mm]
  oval 0.85x0.3 smd paste-0.025 mask+0.05: 1(-1.48,0.75) 2(-1.48,0.25) 3(-1.48,-0.25) 4(-1.48,-0.75) 9(1.48,-0.75) 10(1.48,-0.25) 11(1.48,0.25) 12(1.48,0.75)
  oval 0.3x0.85 smd paste-0.025 mask+0.05: 5(-0.75,-1.48) 6(-0.25,-1.48) 7(0.25,-1.48) 8(0.75,-1.48) 13(0.75,1.48) 14(0.25,1.48) 15(-0.25,1.48) 16(-0.75,1.48)
  round 0.4 smd paste-0.025 mask+0.075: 17(0,0)
  silkscreen extent -3.05,-1.9 1.9,1.9, body extent -1.9,-1.9 1.9,1.9, height 1
R0402R [mm]
  rrect33% 0.6x0.6 smd paste-0.025 mask+0.05: 1(-0.5,0) 2(0.5,0)
  body extent -0.5,-0.25 0.5,0.25, height 0.5
R0603 [mm]
  rrect12% 0.95x0.83 smd paste-0.025 mask+0.05: 1(-0.9,0) 2(0.9,0)
  silkscreen extent -1.74,-0.6 1.74,0.6, body extent -0.8,-0.4 0.8,0.4, height 1
R0805 [mm]
  rrect24% 1.25x1.35 smd paste-0.025 mask+0.075: 1(-1,0) 2(1,0)
  silkscreen extent -2.05,-0.93 2.05,0.93, body extent -1,-0.63 1,0.63, height 1.3
SO8 [mm]
  rrect16% 0.63x2 smd paste-0.025 mask-127: 1(-1.905,-2.603) 2(-0.635,-2.603) 3(0.635,-2.603) 4(1.905,-2.603) 5(1.905,2.603) 6(0.635,2.603) 7(-0.635,2.603) 8(-1.905,2.603)
  silkscreen extent -2.54,-4.82 2.54,3.81, body extent -2.54,-2.01 2.54,2.01, height 1.75
sot23_mech [mm]
  body extent -1.45,-1.25 1.45,1.25, height 2.2
SOT23_new_mech [mm]
  rrect33% 0.6x1.27 smd paste-0.025 mask-127: 1(-0.95,-1) 2(0.95,-1) 3(0,1)
  silkscreen extent -1.5,-0.63 1.5,0.75, body extent -1.45,-0.7 1.45,0.7, height 1.09
SOT363 [mm]
  rrect29% 0.35x0.75 smd paste+0 mask+0.025: 1(-0.65,-0.95) 2(0,-0.95) 3(0.65,-0.95) 4(0.65,0.95) 5(0,0.95) 6(-0.65,0.95)
  silkscreen extent -1.1,-2.12 1.1,1.35, body extent -1.1,-0.65 1.1,0.65, height 1.1
TP_1mm [mm]
  round 1 smd paste-127 mask+0.084: 1(0,0)
TSOP66 [mm]
  rrect29% 0.35x1.5 smd paste+0 mask+0.025: 1(-10.4,-5.65) 2(-9.75,-5.65) 3(-9.1,-5.65) 4(-8.45,-5.65) 5(-7.8,-5.65) 6(-7.15,-5.65) 7(-6.5,-5.65) 8(-5.85,-5.65) 9(-5.2,-5.65) 10(-4.55,-5.65) 11(-3.9,-5.65) 12(-3.25,-5.65) 13(-2.6,-5.65) 14(-1.95,-5.65) 15(-1.3,-5.65) 16(-0.65,-5.65) 17(0,-5.65) 18(0.65,-5.65) 19(1.3,-5.65) 20(1.95,-5.65) 21(2.6,-5.65) 22(3.25,-5.65) 23(3.9,-5.65) 24(4.55,-5.65) 25(5.2,-5.65) 26(5.85,-5.65) 27(6.5,-5.65) 28(7.15,-5.65) 29(7.8,-5.65) 30(8.45,-5.65) 31(9.1,-5.65) 32(9.75,-5.65) 33(10.4,-5.65) 34(10.4,5.65) 35(9.75,5.65) 36(9.1,5.65) 37(8.45,5.65) 38(7.8,5.65) 39(7.15,5.65) 40(6.5,5.65) 41(5.85,5.65) 42(5.2,5.65) 43(4.55,5.65) 44(3.9,5.65) 45(3.25,5.65) 46(2.6,5.65) 47(1.95,5.65) 48(1.3,5.65) 49(0.65,5.65) 50(0,5.65) 51(-0.65,5.65) 52(-1.3,5.65) 53(-1.95,5.65) 54(-2.6,5.65) 55(-3.25,5.65) 56(-3.9,5.65) 57(-4.55,5.65) 58(-5.2,5.65) 59(-5.85,5.65) 60(-6.5,5.65) 61(-7.15,5.65) 62(-7.8,5.65) 63(-8.45,5.65) 64(-9.1,5.65) 65(-9.75,5.65) 66(-10.4,5.65)
  silkscreen extent -11.11,-7.35 11.11,6.65, body extent -11.11,-5 11.11,5, height 1.2
XTAL_HC49SM [mm]
  rrect20% 4.8x1.5 smd paste-0.025 mask+0.075: 1(-4.572,0) 2(4.572,0)
  silkscreen extent -5.71,-2.29 5.59,2.29, body extent -7.11,-2.29 7.11,2.29, height 5

## Part data
C1 C3 C5 C6 C9 C11 C12 C14 C15 C16 C18 C19 C20 C21 C22 C23 C26 C27 C28 C29 C30 C33 C142 C144 C153 C157 C158 C163 C164 C166 C167 C168 C169 C170 C171 C172: "Part Number = C0603_100nF_X7R"
C2 C4 C8 C10 C34 C145 C146 C147 C148 C149 C152 C155 C160 C161 C162: "Part Number = C0603_10uF_X7R"
C7 C17: "Part Number = C0603_10pF_NPO"
C13 C150 C151 C165: "Part Number = C0603_1uF_X7R"
C24 C25: "Part Number = C0603_open"
C31 C154: "Part Number = C0805_10uF_X5R_16V"
C32 C143: "Part Number = CTantD_220uF_6V3"
C35: "Part Number = C0603_2uF2_X5R 16V"
C36 C159: "Part Number = C0603_10nF_X7R"
C156: "Part Number = C0603_47pF_NPO"
D1: "Part Number = BZX84C5V1"
D10: "Part Number = BAT54S"
D11: "Part Number = CD0603"
FB1 FB2 FB5 FB6: "Part Number = BLM18AG221SN1"
L1: "Part Number = 744025100"
L2: "Part Number = 744025002"
LD1: "Part Number = LED_0603"
P1 P5: "Part Number = CN_PLD_16_2mm"
P2: "Part Number = CN_USBA-1J"
P3 P4 P6: "Part Number = CN_PBD_6_2mm"
P7: "Part Number = CN_PBD_12_2mm"
P8: "Part Number = 350-021-12_Dinkle"
P9 P10: "Part Number = CN_AUDIO_3M5_ST033"
P11: "Part Number = CN_HDR_1x2"
P25: "Part Number = MICRO-SD_503182-0852"
Q1: "Part Number = BC847BS"
R1 R2 R12 R13 R22 R23: "Part Number = R0603_open"
R3 R4 R5 R6 R7 R8 R9 R10 R112 R122 R123 R124 R125 R126 R127 R128: "Part Number = R0402_open"
R11 R20 R110: "Part Number = R0603_10K"
R14 R15 R16 R17 R18 R19 R108 R109 R118: "Part Number = R0603_10K 1%"
R21 R111 R113 R116 R117: "Part Number = R0603_1K 1%"
R24: "Part Number = R0603_360K"
R25: "Part Number = R0603_100K 1%"
R26: "Part Number = R0603_1K"
R104 R105: "Part Number = R0603_100"
R106 R107: "Part Number = R0603_4K7 1%"
R114 R115 R120 R121: "Part Number = R0603_0 Ohm"
R119: "Part Number = R0603_100K"
RK1: "Part Number = NTC0805_10K_Epcos"
TP1 TP2 TP3 TP16 TP17 TP18 TP19 TP20 TP21 TP22 TP23: "Part Number = TEST_POINT_1mm"
U1: "Part Number = M25P64-VME6"
U2: "Part Number = MCIMX233CAG4C"
U3: "Part Number = AT24C16AN"
U4: "Part Number = TPS62150A"
U22: "Part Number = MT46V16M16TG"
X1: "Part Number = QUARTZ_49"
?: "Part Number = LAM_SEQ_4Both_FAB"

## Free pads (board coordinates)
  round 0 hole 3.2 unplated paste-127 mask+1.7: ""(4,3.75) ""(4,42.95) ""(4,66.25) ""(37.5,3.75) ""(37.5,42.95) ""(37.5,66.25)

## Via types
v1: diameter 0.56, hole 0.3, Layer 1 to Layer 4, 218 vias
v2: diameter 0.5, hole 0.3, Layer 1 to Layer 4, 21 vias

## Nets (pads, with @x,y where several pads share a name; then routed paths per layer and width w, separated by ;. In a path a pad name is that pad's centre, name@x,y a point inside that pad or via, vN(x,y) a via of type N, cw(c..) or ccw(c..) an arc to the next point about the centre after c; other vN are vias at no path point)
2V5_DDR: C5.1 C8.1 C9.1 C11.1 C14.1 C15.1 C19.1 C23.1 C30.1 C142.1 C144.1 C153.1 C157.1 C158.1 C161.1 C163.1 C164.1 C167.1 C168.1 C171.1 C172.1 R20.1 R111.1 U2.38 U2.45 U2.53 U2.106 U22.1 U22.3 U22.9 U22.15 U22.18 U22.33 U22.55 U22.61 | length 41.2
  Layer 1 w0.2: C5.1@11.05,14.95 v2(11.95,14.95) ; v1(13.9,16.2) 13.95,16.15 C9.1@13.95,15.15 C8.1@13.95,13.95 v1(13.95,13.05) ; C11.1@15.85,1.5 v1(15.85,2.4) ; U2.38@16.8,18.55 16.8,17.77 16.8,17.2 v1(17.8,16.2) ; v1(19.4,20.25) 19.6,20.05 U2.45@19.6,18.55 ; C14.1@19.75,1.5 v1(19.75,2.4) C15.1@19.75,3.3 ; U2.53@22.8,18.55 v1(22.8,19.55) ; U2.106@23.6,33.95 23.6,34.8 v1(23.45,34.95) 23.6,35.1 C19.1@23.6,35.95 ; v2(25.2,10.35) R20.1@26.5,10.35 ; C23.1@28.2,1.45 v1(29.2,1.45) ; v1(34.05,14.95) C30.1@34.95,14.95
  Layer 3 w0.2: 23.28,32.35 23.28,33.44
  Layer 4 w0.2: C172.1@9.85,14.95 C171.1@11.05,14.95 v2(11.95,14.95) U22.1@12.6,14.95 ; U22.3@13.9,14.95 v1(13.9,16.2) C168.1@13.9,17.15 ; C167.1@15.85,1.5 v1(15.85,2.4) U22.61@15.85,3.65 ; U22.9@17.8,14.95 v1(17.8,16.2) C164.1@17.8,17.15 ; C163.1@19.75,1.5 v1(19.75,2.4) U22.55@19.75,3.65 ; U22.15@21.7,14.95 v1(21.7,16.2) C157.1@21.7,17.15 ; v1(22.8,19.55) C158.1@22.8,20.5 ; C161.1@23.3,35.95 23.3,35.1 v1(23.45,34.95) ; U22.18@23.65,14.95 v1(23.65,16.2) C153.1@23.65,17.15 ; R111.1@28.2,1.45 v1(29.2,1.45) ; U22.33@33.4,14.95 v1(34.05,14.95) C144.1@34.95,14.95 C142.1@36.15,14.95 v1(37.05,14.95)
3V3: 
3V3_EXT: C31.1 FB2.1 L2.2 R24.1 U4.14 | length 16.7
  Layer 1 w0.2: L2.2@38.75,36.65 40.57,36.65 40.69,36.53 40.69,31.48 40.46,31.25 U4.14@39.98,31.25
  Layer 1 w0.3: R24.1@34.45,32.15 34.45,33.84 34.25,34.04 FB2.1@34.25,34.65 34.25,35.42 34.41,35.58 35.88,35.58 36,35.7 C31.1@36,36.55 36.1,36.65 L2.2@38.75,36.65
3V3_FUSED: 
3V3_IMX: C20.1 C26.1 C145.1 C146.1 C169.1 C170.1 D10.2 FB1.2 FB2.2 FB5.2 P1.14 P5.3 P7.9 P7.10 R11.2 R14.2 R15.2 R18.2 R19.2 R118.1 R122.2 R123.2 R124.2 R125.2 R126.2 R127.2 R128.2 TP3.1 U1.8 U2.18 U2.92 U3.8 | length 46
  Layer 1 w0.2: U1.8@10.245,10.775 10.25,10.775 v1(10.25,9.9) ; R11.2@10.95,18.85 v1(11.85,18.85) ; U2.18@13.3,25.65 14.043,25.65 ; R14.2@17,48.2 v1(18,48.2) ; R15.2@17,54.7 v1(18.8,54.7) ; U3.8@20.496,58.345 20.496,57.75 20.5,57.75 20.5,57.7 v1(20.9,57.3) 21.2,57 C20.1@22.1,57 ; R18.2@23.9,54.5 23.96,54.5 24.214,54.754 24.454,54.754 v1(24.85,55.15) 24.454,55.546 24.214,55.546 24.01,55.75 R19.2@23.9,55.75 ; TP3.1@25.669,46.056 26.644,46.056 v1(26.65,46.05) ; U2.92@28.7,30.85 29.33,30.85 29.63,30.55 30.242,30.55 30.242,30.548 C26.1@30.84,29.95 ; v1(29.9,29.95) C26.1@30.84,29.95 ; C26.1@30.9,29.95 C26.1@30.84,29.95
  Layer 1 w0.3: v1(3.75,25.4) 4.9,26.55 FB1.2@4.9,29.3 ; 14.043,25.65 14.08,25.65 14.35,25.65 14.5,25.5 14.5,25.35 v1(14.9,24.95) ; FB2.2@34.25,36.45 v1(34.25,37.45)
  Layer 3 w0.2: 3.98,60.58 6.144,60.58 ; 4.02,58.58 5.712,58.58 ; 19.62,64 19.62,66.26 ; 21.567,63.92 21.58,63.933 21.58,65.962
  Layer 4 w0.2: v1(7.093,39.18) 7.173,39.1 R122.2@8,39.1 R123.2@8,40.05 R124.2@8,41 R125.2@8,41.95 R126.2@8,42.9 R127.2@8,43.85 R128.2@8,44.75 8,44.8 v1(7.25,45.55) ; C170.1@10.25,8.95 v1(10.25,9.9) ; v1(13.8,45.6) 14.2,45.2 14.5,45.2 14.8,44.9 C169.1@14.8,44.2 R118.1@14.8,43 ; D10.2@27.5,37.3 v1(28.6,37.3) ; FB5.2@28.9,30.3 29.6,30.3 29.9,30 v1(29.9,29.95) C146.1@30.9,29.95 C145.1@30.9,28.65
5V_USB: C32.1 C35.1 C154.1 FB6.2 P1.16 P5.1 P8.1 R22.2 R26.2 U2.102 U4.10 U4.11 U4.12 | length 150.6
  Layer 1 w0.2: U2.102@25.2,33.95 25.2,33.15 v1(25.4,32.95) ; C32.1@36.03,25.93 36.78,25.18 36.85,25.18 C32.1@36.85,25.175 ; U4.10@38.25,30.02 38.25,29.49 38.39,29.35 38.75,29.35 39.11,29.35 39.25,29.49 U4.12@39.25,30.02
  Layer 1 w0.3: R22.2@34.45,27.45 34.45,26.481 34.451,26.48 34.451,25.95 ; C32.1@36.85,25.175 C32.1@37.16,25.175 ; C35.1@37.9,27.45 37.9,26.117 37.16,25.377 C32.1@37.16,25.175 ; U4.11@38.75,30.02 38.75,29.35 38.75,29.04 38.8,28.99 v2(38.8,28.05) 38.8,25.385 38.608,25.193 ; R26.2@39.75,23.7 39.048,23.7 38.666,24.083 38.666,25.135 38.608,25.193 ; C32.1@37.16,25.175 37.162,25.173 38.588,25.173 38.608,25.193
  Layer 1 w0.5: v1(31.75,25.95) 34.451,25.95 35.26,25.95 35.28,25.93 C32.1@36.03,25.93
  Layer 2 w0.2: P1.16@3,61.6 4.006,62.606 5.672,62.606 5.821,62.755 7.618,64.552 7.618,64.56 7.62,64.562 7.62,66.556 7.62,66.844 7.62,67.855 8.002,68.236 8.246,68.236 21.614,68.236 P5.1@22.6,67.25
  Layer 2 w0.5: v1(2.85,18.75) 5.2,18.75 12.8,26.35 22.79,26.35 22.89,26.25 23.73,25.41 25.91,25.41 27.12,26.62 27.3,26.8 30.9,26.8 v1(31.75,25.95) ; P5.1@22.6,67.25 23.498,68.148 30.301,68.148 30.969,67.48 ; v1(25.4,32.95) 25.4,33.16 25.9,33.66 27.55,33.66 29.34,35.45 v1(39.65,35.45) ; 30.97,67.48 P8.1@32.15,66.3
  Layer 3 w0.5: P8.1@32.15,66.3 32.16,66.3 34.57,63.89 34.57,46.06 33.75,45.24 33.75,41.35 v1(39.65,35.45) 39.65,34.89 39.66,34.88 39.66,30.58 38.8,29.72 v2(38.8,28.05)
  Layer 4 w0.3: v1(25.4,32.95) 25.6,32.75 C154.1@25.6,31.75
  Layer 4 w0.5: v1(2.85,18.75) FB6.2@3.8,18.75
5VI: 
8V: 
A[0]: U2.76 U22.29 | length 20.8
  Layer 1 w0.2: U2.76@28.7,24.45 29.48,24.45 29.65,24.45 v1(30.25,25.05)
  Layer 4 w0.2: v1(30.25,25.05) 30.25,20.51 29.98,20.24 29.98,20.04 30.12,19.9 30.92,19.9 31.06,19.76 31.06,19.57 30.92,19.43 30.02,19.43 29.88,19.29 29.88,19.1 30.02,18.96 30.92,18.96 31.06,18.82 31.06,18.61 30.9,18.45 30.03,18.45 29.89,18.31 29.89,18.08 30.03,17.94 30.93,17.94 31.07,17.8 31.07,17.6 30.93,17.46 30.02,17.46 29.88,17.32 29.88,17.11 30.02,16.97 30.9,16.97 31.07,16.8 31.07,16.61 30.93,16.47 30.02,16.47 29.88,16.33 29.88,16.13 30.02,15.99 30.66,15.99 30.8,15.85 U22.29@30.8,14.95
A[1]: U2.75 U22.30 | length 21.2
  Layer 1 w0.2: U2.75@28.7,24.05 29.48,24.05 29.66,24.05 29.67,24.06 30.36,24.06 v1(30.85,24.55)
  Layer 4 w0.2: v1(30.85,24.55) 31.41,24.55 31.51,24.45 31.51,24.07 31.37,23.93 30.77,23.93 30.63,23.79 30.63,23.59 30.77,23.45 31.88,23.45 32.02,23.31 32.02,23.07 31.88,22.93 30.78,22.93 30.63,22.78 30.63,22.58 30.78,22.43 31.87,22.43 32.02,22.28 32.02,22.08 31.87,21.93 30.78,21.93 30.63,21.78 30.63,21.58 30.78,21.43 31.87,21.43 32.02,21.28 32.02,21.08 31.87,20.93 30.78,20.93 30.63,20.78 30.63,20.58 30.78,20.43 31.3,20.43 31.45,20.28 U22.30@31.45,14.95
A[2]: U2.74 U22.31 | length 21.8
  Layer 1 w0.2: U2.74@28.7,23.65 29.48,23.65 31.65,23.65 v1(32.1,24.1)
  Layer 4 w0.2: U22.31@32.1,14.95 32.1,15.98 31.83,16.25 31.83,16.307 31.83,16.69 31.98,16.84 33.26,16.84 33.4,16.98 33.4,17.2 33.26,17.34 31.98,17.34 31.83,17.49 31.83,17.69 31.98,17.84 33.26,17.84 33.4,17.98 33.4,18.2 33.26,18.34 31.98,18.34 31.83,18.49 31.83,18.69 31.98,18.84 33.26,18.84 33.4,18.98 33.4,19.2 33.26,19.34 31.98,19.34 31.83,19.49 31.83,20.088 31.83,20.4 31.97,20.54 32.26,20.54 32.4,20.68 32.4,23.8 v1(32.1,24.1)
A[3]: U2.73 U22.32 | length 21.2
  Layer 1 w0.2: U2.73@28.7,23.25 29.48,23.25 v1(33.3,23.25)
  Layer 4 w0.2: U22.32@32.75,14.95 32.75,16.21 32.89,16.35 33.65,16.35 33.79,16.49 33.79,18.331 33.79,19.72 33.64,19.87 32.93,19.87 32.78,20.02 32.78,20.22 32.93,20.37 34.19,20.37 34.34,20.52 34.34,20.72 34.19,20.87 32.93,20.87 32.78,21.02 32.78,21.22 32.93,21.37 34.19,21.37 34.34,21.52 34.34,21.72 34.19,21.87 32.93,21.87 32.78,22.02 32.78,22.22 32.93,22.37 33.64,22.37 33.79,22.52 33.79,22.76 v1(33.3,23.25)
A[4]: U2.72 U22.35 | length 21.7
  Layer 1 w0.2: U2.72@28.7,22.85 29.48,22.85 30.11,22.85 32.75,20.21 v1(32.75,4.9)
  Layer 4 w0.2: U22.35@32.75,3.65 v1(32.75,4.9)
A[5]: U2.71 U22.36 | length 21.2
  Layer 1 w0.2: U2.71@28.7,22.45 29.48,22.45 29.97,22.45 32.36,20.06 32.36,8.51 32.1,8.25 v1(32.1,5.3)
  Layer 4 w0.2: U22.36@32.1,3.65 v1(32.1,5.3)
A[6]: U2.70 U22.37 | length 21.4
  Layer 1 w0.2: U2.70@28.7,22.05 29.48,22.05 29.83,22.05 31.98,19.9 31.98,9.11 31.84,8.97 31.65,8.97 31.52,9.1 31.32,9.1 31.18,8.96 31.18,8.69 31.45,8.42 v1(31.45,4.9)
  Layer 4 w0.2: U22.37@31.45,3.65 v1(31.45,4.9)
A[7]: U2.69 U22.38 | length 21.5
  Layer 1 w0.2: U2.69@28.7,21.65 29.48,21.65 29.69,21.65 31.52,19.82 31.52,9.62 31.38,9.48 31.18,9.48 31.04,9.62 31.04,9.86 30.9,10 30.69,10 30.55,9.86 30.55,9.28 30.8,9.03 v1(30.8,5.3)
  Layer 4 w0.2: U22.38@30.8,3.65 v1(30.8,5.3)
A[8]: U2.68 U22.39 | length 21.6
  Layer 1 w0.2: U2.68@28.7,21.25 29.48,21.25 29.55,21.25 31.1,19.7 31.1,10.52 30.96,10.38 30.76,10.38 30.62,10.52 30.62,11.17 30.48,11.31 30.29,11.31 30.15,11.17 v1(30.15,4.9)
  Layer 4 w0.2: U22.39@30.15,3.65 v1(30.15,4.9)
A[9]: U2.67 U22.40 | length 21.7
  Layer 1 w0.2: U2.67@28.7,20.85 29.407,20.85 30.71,19.547 30.71,13.21 30.7,13.2 30.7,11.85 30.56,11.71 30.26,11.71 30.12,11.85 30.12,12.75 29.98,12.89 29.64,12.89 29.5,12.75 v1(29.5,5.3)
  Layer 4 w0.2: U22.40@29.5,3.65 v1(29.5,5.3)
A[10]: U2.66 U22.28 | length 22
  Layer 1 w0.2: U2.66@28.7,20.45 29.267,20.45 30.15,19.567 30.15,19.18 30,19.03 28.69,19.03 28.54,18.88 28.54,18.68 28.69,18.53 30.18,18.53 30.33,18.38 30.33,18.18 30.18,18.03 28.69,18.03 28.54,17.88 28.54,17.68 28.69,17.53 30.18,17.53 30.33,17.38 30.33,17.18 30.18,17.03 28.69,17.03 28.54,16.88 28.54,16.68 28.69,16.53 30.18,16.53 30.33,16.38 30.33,16.18 30.18,16.03 28.69,16.03 28.54,15.88 28.54,15.68 28.69,15.53 30,15.53 30.15,15.38 v1(30.15,13.45)
  Layer 4 w0.2: v1(30.15,13.45) U22.28@30.15,14.95
A[11]: U2.65 U22.41 | length 21.9
  Layer 1 w0.2: U2.65@28.7,20.05 28.7,19.67 28.7,19.58 28.16,19.04 28.16,15.433 28.443,15.15 29.45,15.15 29.59,15.01 29.59,14.75 29.45,14.61 28.3,14.61 28.16,14.47 28.16,14.26 28.3,14.12 29.45,14.12 29.59,13.98 29.59,13.71 29.45,13.57 28.3,13.57 28.16,13.43 28.16,12.83 28.85,12.14 v1(28.85,4.9)
  Layer 4 w0.2: U22.41@28.85,3.65 v1(28.85,4.9)
A[12]: U2.64 U22.42 | length 22
  Layer 1 w0.2: v1(27.2,6.3) 25.64,6.3 25.46,6.48 25.46,6.8 25.6,6.94 27.24,6.94 27.38,7.08 27.38,7.36 27.24,7.5 25.6,7.5 25.46,7.64 25.46,7.89 25.6,8.03 27.06,8.03 27.2,8.17 27.2,17.77 U2.64@27.2,18.55
  Layer 4 w0.2: v1(27.2,6.3) 28.2,5.3 U22.42@28.2,3.65
A_RXD: P6.3 P7.2 R12.2 R14.1 U2.128 | length 39.5
  Layer 1 w0.2: R12.2@11,36.95 v1(12.2,36.95) ; v1(14.55,32.2) 14.55,32.92 14.8,33.17 U2.128@14.8,33.95 ; R14.1@15.2,48.2 P7.2@15.2,50.25
  Layer 2 w0.2: v1(14.55,32.2) 14.55,32.76 14.797,33.007 14.797,36.224 15.898,37.325 15.898,49.552 P7.2@15.2,50.25
  Layer 3 w0.2: v1(12.2,36.95) 14.55,34.6 v1(14.55,32.2)
  Layer 4 w0.2: P7.2@15.2,50.25 15.21,50.25 16.18,51.22 16.18,58.23 P6.3@15.2,59.21
A_TXD: P6.4 P7.4 R13.2 U2.127 | length 39.1
  Layer 1 w0.2: R13.2@11,38.15 v1(12.2,38.15) ; U2.127@15.2,33.95 15.2,33.17 15.45,32.92 v1(15.45,32.2)
  Layer 2 w0.2: v1(15.45,32.2) 15.45,32.79 15.177,33.063 15.177,36.067 16.278,37.168 16.278,49.328 P7.4@17.2,50.25
  Layer 3 w0.2: v1(12.2,38.15) 15.45,34.9 v1(15.45,32.2)
  Layer 4 w0.2: P7.4@17.2,50.25 17.21,50.25 18.18,51.22 18.18,58.23 P6.4@17.2,59.21
ADM2CPLD: 
ADM2GPS: 
AVCC_MSP430: 
BA0: U2.79 U22.26 | length 21.3
  Layer 1 w0.2: v1(27.55,25.65) U2.79@28.7,25.65
  Layer 4 w0.2: v1(27.55,25.65) 28.26,24.94 28.26,19.81 28.12,19.67 27.81,19.67 27.66,19.52 27.66,19.32 27.81,19.17 28.97,19.17 29.12,19.02 29.12,18.82 28.97,18.67 27.81,18.67 27.66,18.52 27.66,18.32 27.81,18.17 28.97,18.17 29.12,18.02 29.12,17.82 28.97,17.67 27.81,17.67 27.66,17.52 27.66,17.32 27.81,17.17 28.97,17.17 29.12,17.02 29.12,16.82 28.97,16.67 27.81,16.67 27.66,16.52 27.66,16.32 27.81,16.17 28.7,16.17 28.85,16.02 U22.26@28.85,14.95
BA1: U2.80 U22.27 | length 21.9
  Layer 1 w0.2: U2.80@28.7,26.05 v1(29.7,26.05)
  Layer 4 w0.2: U22.27@29.5,14.95 29.5,20.045 29.5,20.43 29.35,20.58 28.79,20.58 28.64,20.73 28.64,20.93 28.79,21.08 29.7,21.08 29.84,21.22 29.84,21.44 29.7,21.58 28.79,21.58 28.64,21.73 28.64,21.93 28.79,22.08 29.71,22.08 29.85,22.22 29.85,22.44 29.71,22.58 28.79,22.58 28.64,22.73 28.64,22.93 28.79,23.08 29.71,23.08 29.85,23.22 29.85,23.44 29.71,23.58 28.79,23.58 28.64,23.73 28.64,23.93 28.79,24.08 29.73,24.08 29.87,24.22 29.87,24.44 29.73,24.58 28.79,24.58 28.64,24.73 28.64,24.93 28.79,25.08 29.39,25.08 29.7,25.39 v1(29.7,26.05)
BRIGHT: 
BUF_RXD: 
BUF_TXD: 
BUTT: C22.1 C33.1 C34.1 C143.1 C152.1 C160.1 D1.3 D11.2 P11.1 U2.100 U2.103 | length 50.9
  Layer 1 w0.2: v1(24.6,32.95) 24.8,33.15 U2.103@24.8,33.95 ; C22.1@26,35.95 v1(26,34.95) U2.100@26,33.95 26,33.15 v1(26.2,32.95)
  Layer 1 w0.3: D1.3@36.9,9.95 37.9,9.95 P11.1@39,11.05 38.72,11.05 38.72,12.16 38.45,12.43 C33.1@38.45,13.15 C34.1@39.65,13.15
  Layer 4 w0.2: C160.1@23.4,33.95 24.16,33.95 24.29,33.82 24.29,33.34 24.6,33.03 v1(24.6,32.95) ; C152.1@26,35.95 v1(26,34.95) 26.13,34.82 26.13,33.95 D11.2@26.125,33.95 26.03,33.855 26.03,33.12 v1(26.2,32.95) ; C143.1@36.85,25.175 C143.1@36.85,25.18
  Layer 4 w0.3: v1(24.6,32.95) 24.6,30.84 24.74,30.7 26.117,30.7 ; v1(26.2,32.95) 26.2,32.83 26.57,32.46 26.57,31.04 26.23,30.7 26.117,30.7 ; C143.1@36.85,25.175 36.85,22.75 39,20.6 P11.1@39,11.05 ; C143.1@36.85,25.18 35.08,25.18 35.1,25.2 33.45,26.85 30.276,26.85 29.326,27.8 27.36,27.8 26.117,29.043 26.117,30.7
CAS#: U2.61 U22.22 | length 12.9
  Layer 1 w0.2: v1(25.75,23.05) 25.76,23.05 26,22.81 U2.61@26,18.55
  Layer 4 w0.2: v1(25.75,23.05) 26.25,22.55 U22.22@26.25,14.95
CKE: U2.78 U22.44 | length 23.3
  Layer 1 w0.2: v1(26.9,4.9) 27.76,5.76 27.76,23.27 27.14,23.89 27.14,24.4 27.99,25.25 U2.78@28.7,25.25
  Layer 4 w0.2: U22.44@26.9,3.65 v1(26.9,4.9)
CLKN: R112.1 U2.37 U22.46 | length 24.7
  Layer 1 w0.2: U2.37@16.4,18.55 16.4,17.77 16.4,17.01 16.91,16.5 16.91,15.14 v1(18.7,13.35)
  Layer 4 w0.2: v1(18.7,13.35) 19.26,12.79 20.04,12.79 20.41,13.16 23.44,13.16 25.73,10.87 25.73,8.307 25.73,7.51 25.58,7.36 24.92,7.36 24.78,7.22 24.78,7 24.92,6.86 25.58,6.86 25.73,6.71 25.73,6.109 25.73,4.81 25.6,4.68 U22.46@25.6,3.65 25.6,2.525 R112.1@25.425,2.35
CLKP: R112.2 U2.36 U22.45 | length 24.8
  Layer 1 w0.2: U2.36@16,18.55 16,17.77 16,16.87 16.52,16.35 16.52,14.72 18.51,12.73 18.88,12.73 v1(19.5,13.35)
  Layer 4 w0.2: v1(19.5,13.35) 20.06,13.35 20.25,13.54 23.6,13.54 26.14,11 26.14,4.79 26.25,4.68 U22.45@26.25,3.65 26.22,3.62 26.22,2.35 R112.2@26.425,2.35
CONF1: 
CONF2: 
CONF3: 
CPLD2ADM: 
CPLD2GPS: 
CS: R20.2 U2.63 U22.24 | length 18.4
  Layer 1 w0.2: R20.2@26.5,12.15 26.5,13.07 26.65,13.22 v2(26.65,13.75) ; v1(26.55,23.85) 26.8,23.6 U2.63@26.8,18.55
  Layer 4 w0.2: v1(26.55,23.85) 27.28,23.12 27.28,16.16 27.55,15.89 U22.24@27.55,14.95 27.55,13.92 27.38,13.75 v2(26.65,13.75)
CS0: 
CS_1: 
CS_UEXT: P3.3 U2.32 | length 41
  Layer 1 w0.2: v1(12.3,20.05) U2.32@13.3,20.05
  Layer 2 w0.2: P3.3@11.9,52.25 12.602,51.548 12.602,51.461 15.454,48.61 15.454,37.626 15.258,37.431 13.986,36.159 13.986,31.972 14.358,31.6 v1(17.4,31.6)
  Layer 4 w0.2: v1(12.3,20.05) 12.96,20.71 12.96,21.3 13.44,21.78 14.1,21.78 17.4,25.08 v1(17.4,31.6)
D1: 
D2: 
D3: 
D4: 
D5: 
D6: 
D7: 
D8: 
D[0]: 
D[1]: 
D[2]: 
D[3]: 
D[4]: 
D[5]: 
D[6]: 
D[7]: 
D_IMX[0]: U2.41 U22.2 | length 22.1
  Layer 1 w0.2: v1(13.25,18.05) 14.53,19.33 17.787,19.33 18,19.117 U2.41@18,18.55
  Layer 4 w0.2: U22.2@13.25,14.95 13.25,15.98 12.88,16.35 10.42,16.35 10.28,16.49 10.28,18 10.42,18.14 10.62,18.14 10.76,18 10.76,16.87 10.9,16.73 11.1,16.73 11.24,16.87 11.24,18 11.38,18.14 11.58,18.14 11.72,18 11.72,16.87 11.86,16.73 12.05,16.73 12.19,16.87 12.19,18 12.33,18.14 12.52,18.14 12.66,18 12.66,16.87 12.8,16.73 13.05,16.73 13.19,16.87 13.19,17.99 v1(13.25,18.05)
D_IMX[1]: U2.43 U22.4 | length 22.5
  Layer 1 w0.2: v1(15.9,21.8) 16.41,22.31 17.86,22.31 18.46,21.71 18.46,19.84 18.8,19.5 18.8,19.33 U2.43@18.8,18.55
  Layer 4 w0.2: U22.4@14.55,14.95 14.55,16.54 14.6,16.59 14.6,19.057 14.883,19.34 15.41,19.34 15.59,19.52 15.59,19.72 15.44,19.87 13.48,19.87 13.34,20.01 13.34,20.2 13.48,20.34 15.55,20.34 15.69,20.48 15.69,20.67 15.55,20.81 13.48,20.81 13.34,20.95 13.34,21.14 13.48,21.28 15.38,21.28 v1(15.9,21.8)
D_IMX[2]: U2.42 U22.5 | length 21.9
  Layer 1 w0.2: v1(16.65,21.75) 17.88,21.75 18.03,21.6 18.03,21.28 17.91,21.16 14.92,21.16 14.78,21.02 14.78,20.82 14.92,20.68 16.62,20.68 16.76,20.54 16.76,20.35 16.62,20.21 14.94,20.21 14.8,20.07 14.8,19.85 14.94,19.71 18.05,19.71 18.4,19.36 U2.42@18.4,18.55
  Layer 4 w0.2: U22.5@15.2,14.95 15.2,18.33 16.12,19.25 16.12,20.66 16.65,21.19 v1(16.65,21.75)
D_IMX[3]: U2.44 U22.7 | length 21.7
  Layer 1 w0.2: v1(16.6,22.9) 17.81,22.9 18.84,21.87 18.84,20 19.2,19.64 19.2,19.33 U2.44@19.2,18.55
  Layer 4 w0.2: U22.7@16.5,14.95 16.5,16.23 16.69,16.42 16.69,16.62 16.55,16.76 15.73,16.76 15.59,16.9 15.59,17.1 15.73,17.24 16.57,17.24 16.71,17.38 16.71,17.57 16.57,17.71 15.74,17.71 15.6,17.85 15.6,18.04 15.74,18.18 16.407,18.18 16.69,18.463 16.69,20.69 17.39,21.39 17.98,21.39 18.12,21.53 18.12,21.73 17.98,21.87 17.35,21.87 17.21,22.01 17.21,22.23 17.35,22.37 17.98,22.37 18.1,22.49 18.1,22.75 17.95,22.9 v1(16.6,22.9)
D_IMX[4]: U2.47 U22.8 | length 20.2
  Layer 1 w0.2: v1(17.05,23.5) 17.75,23.5 18.8,22.45 20.27,22.45 20.41,22.31 20.41,22.07 20.27,21.93 19.43,21.93 19.29,21.79 19.29,21.6 19.43,21.46 20.277,21.46 20.56,21.177 20.56,20.65 20.4,20.49 U2.47@20.4,18.55
  Layer 4 w0.2: v1(17.05,23.5) 17.89,23.5 18.5,22.89 18.5,21.37 17.99,20.86 17.56,20.86 17.1,20.4 17.1,16.59 17.15,16.54 U22.8@17.15,14.95
D_IMX[5]: U2.48 U22.10 | length 21.2
  Layer 1 w0.2: v1(19.25,23.85) 20.27,22.83 20.43,22.83 20.79,22.47 20.79,21.49 20.94,21.34 20.94,20.38 20.8,20.24 20.8,19.33 U2.48@20.8,18.55
  Layer 4 w0.2: U22.10@18.45,14.95 18.45,16.54 18.5,16.59 18.5,19.81 18.46,19.85 18.46,20.7 19.05,21.29 19.05,22.14 19.2,22.29 20.54,22.29 20.69,22.44 20.69,22.64 20.54,22.79 19.2,22.79 19.05,22.94 19.05,23.1 19.2,23.25 20.62,23.25 20.74,23.37 20.74,23.69 20.58,23.85 v1(19.25,23.85)
D_IMX[6]: U2.49 U22.11 | length 19.5
  Layer 1 w0.2: U2.49@21.2,18.55 21.2,20.1 21.57,20.47 23.14,20.47 23.33,20.66 23.33,20.86 23.18,21.01 21.46,21.01 21.32,21.15 21.32,21.34 21.46,21.48 23.15,21.48 23.27,21.6 23.27,21.74 22.96,22.05 v1(21.35,22.05)
  Layer 4 w0.2: U22.11@19.1,14.95 19.1,19.75 18.84,20.01 18.84,20.54 19.95,21.65 20.95,21.65 v1(21.35,22.05)
D_IMX[7]: U2.50 U22.13 | length 21.7
  Layer 1 w0.2: v1(20.95,16.2) 20.95,16.62 21.09,16.76 21.51,16.76 21.62,16.87 21.62,17.18 21.53,17.27 18.72,17.27 18.61,17.38 18.61,17.63 18.74,17.76 21.5,17.76 21.5,17.767 21.6,17.867 U2.50@21.6,18.55
  Layer 4 w0.2: U22.13@20.4,14.95 20.4,15.98 20.36,16.02 20.36,16.92 20.22,17.06 19.63,17.06 19.48,17.21 19.48,17.41 19.63,17.56 20.26,17.56 20.4,17.7 20.4,17.92 20.26,18.06 19.63,18.06 19.48,18.21 19.48,18.41 19.63,18.56 20.3,18.56 20.44,18.7 20.44,18.92 20.3,19.06 19.63,19.06 19.48,19.21 19.48,19.41 19.63,19.56 20.81,19.56 20.95,19.42 v1(20.95,16.2)